# Allegro board Beamforming_PCB_Ver1_0_0.brd
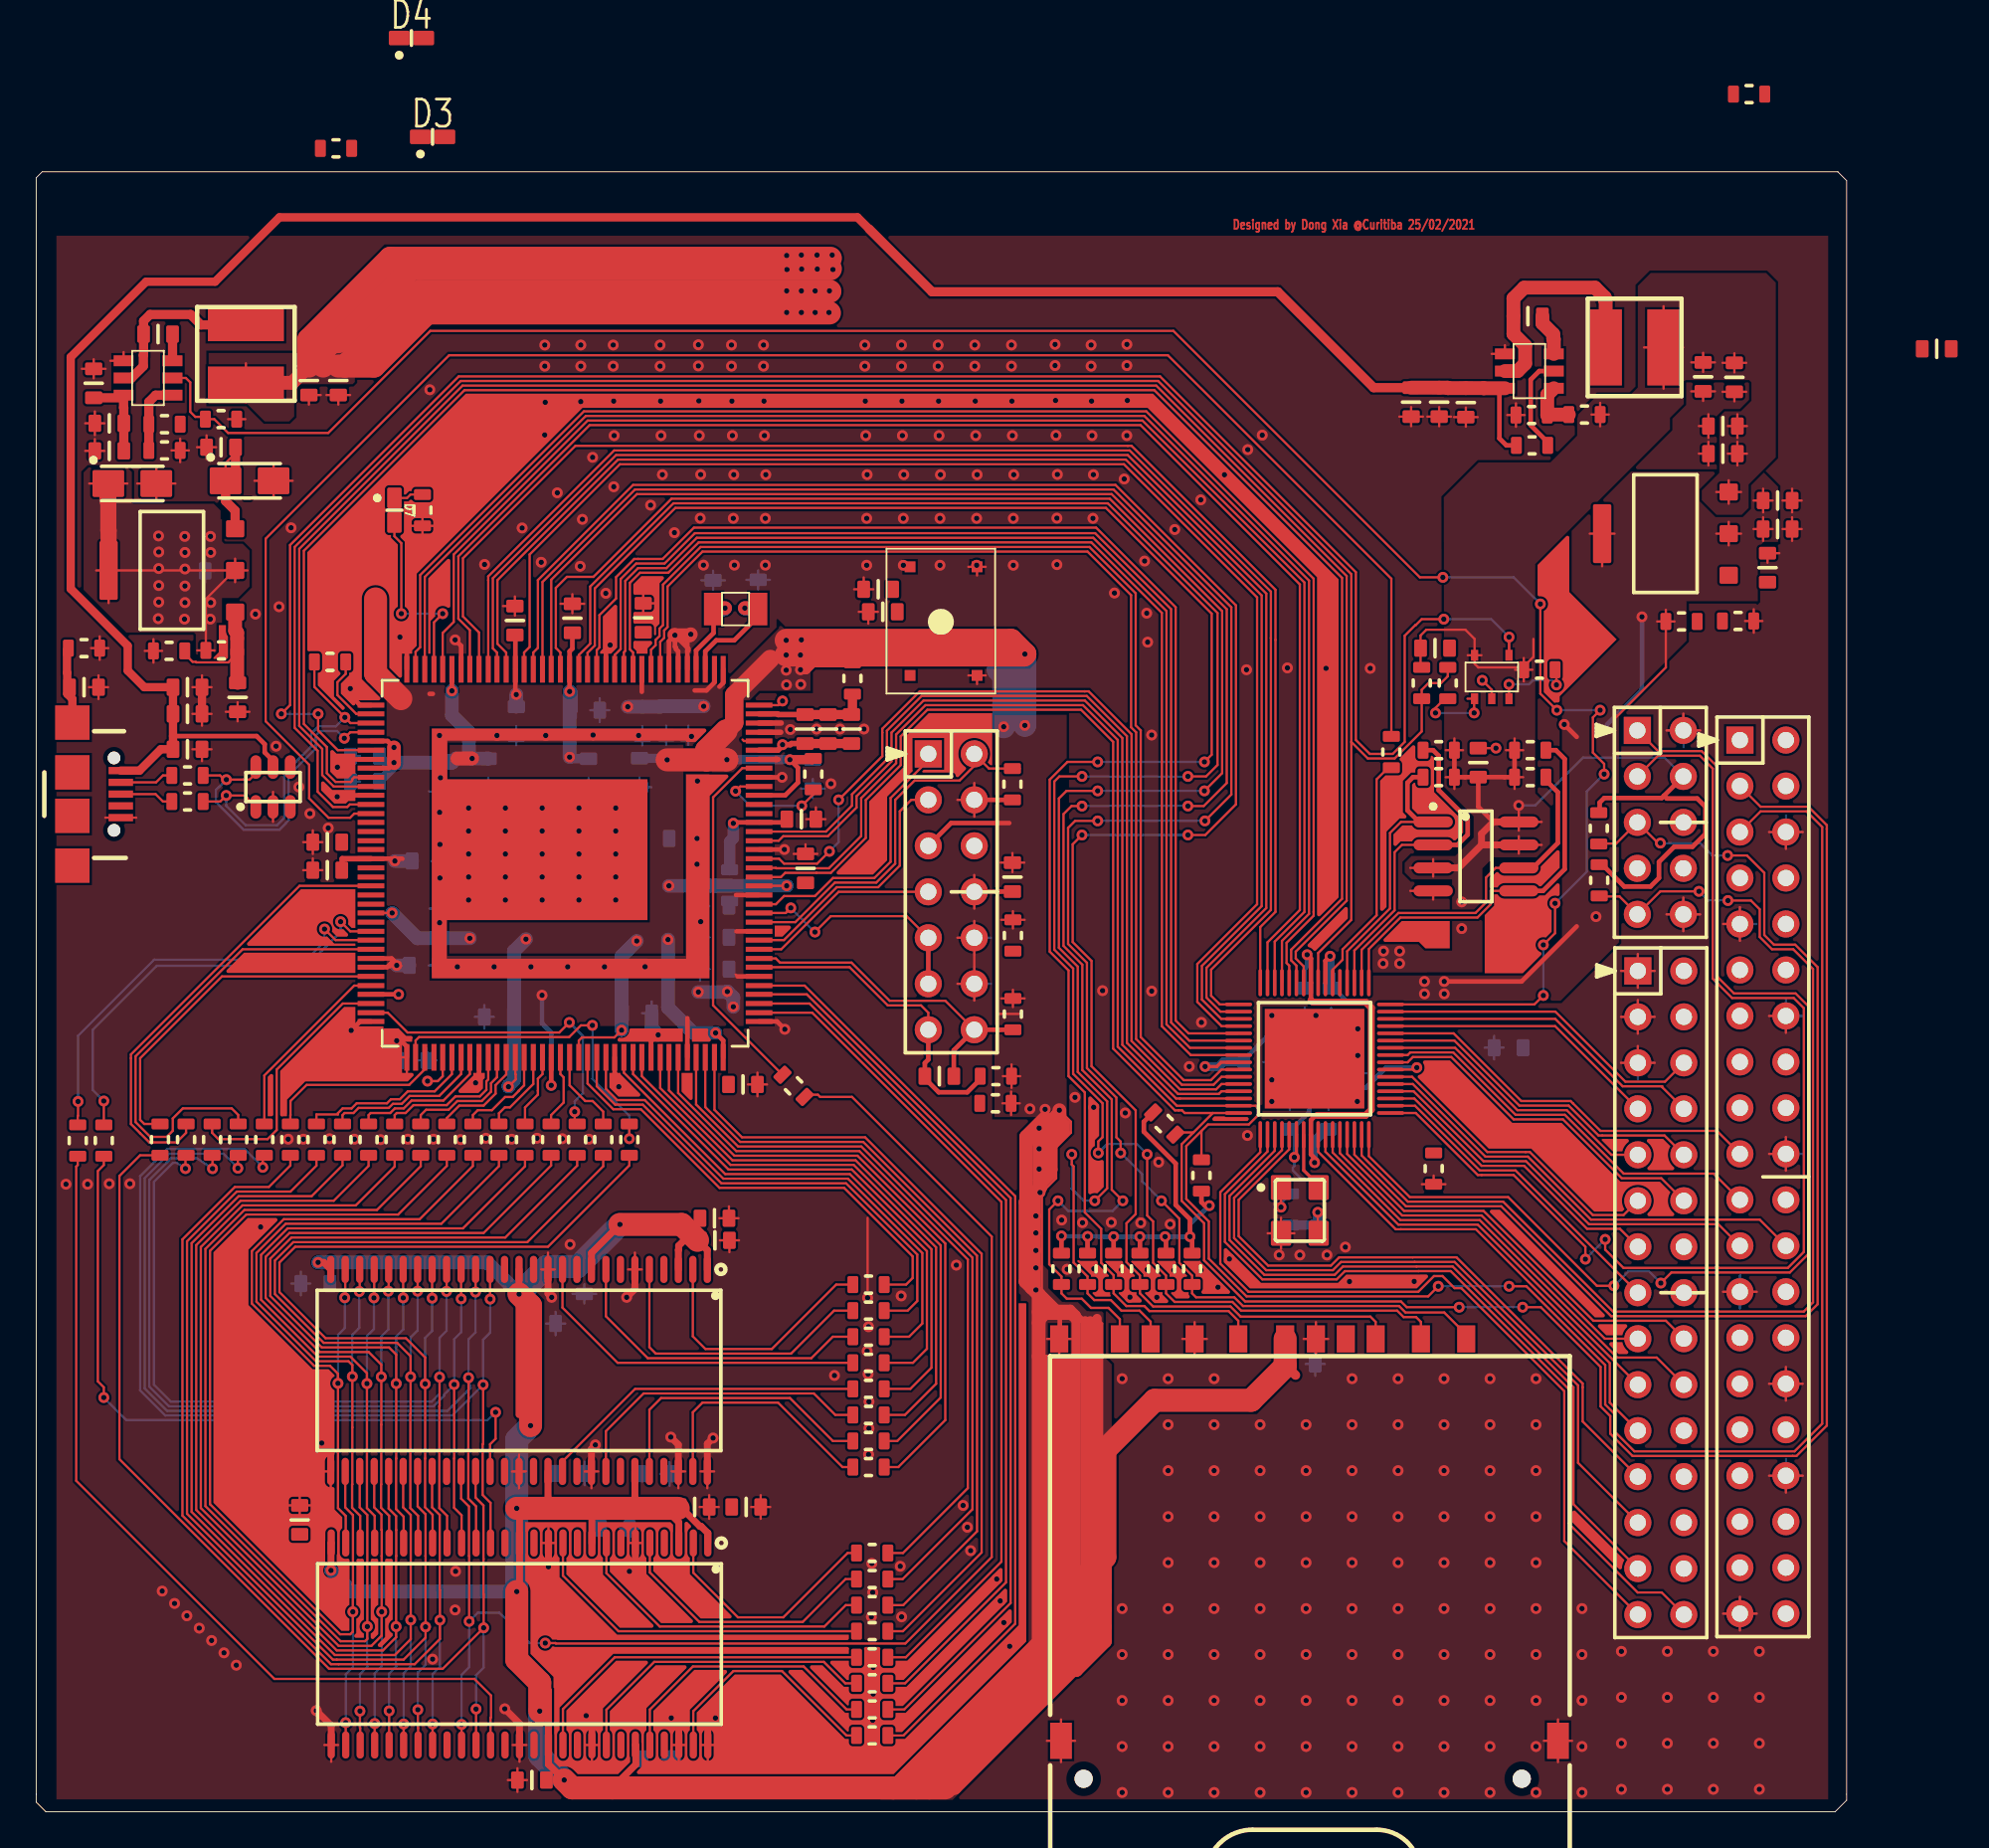
[diagram p0: board, top side]
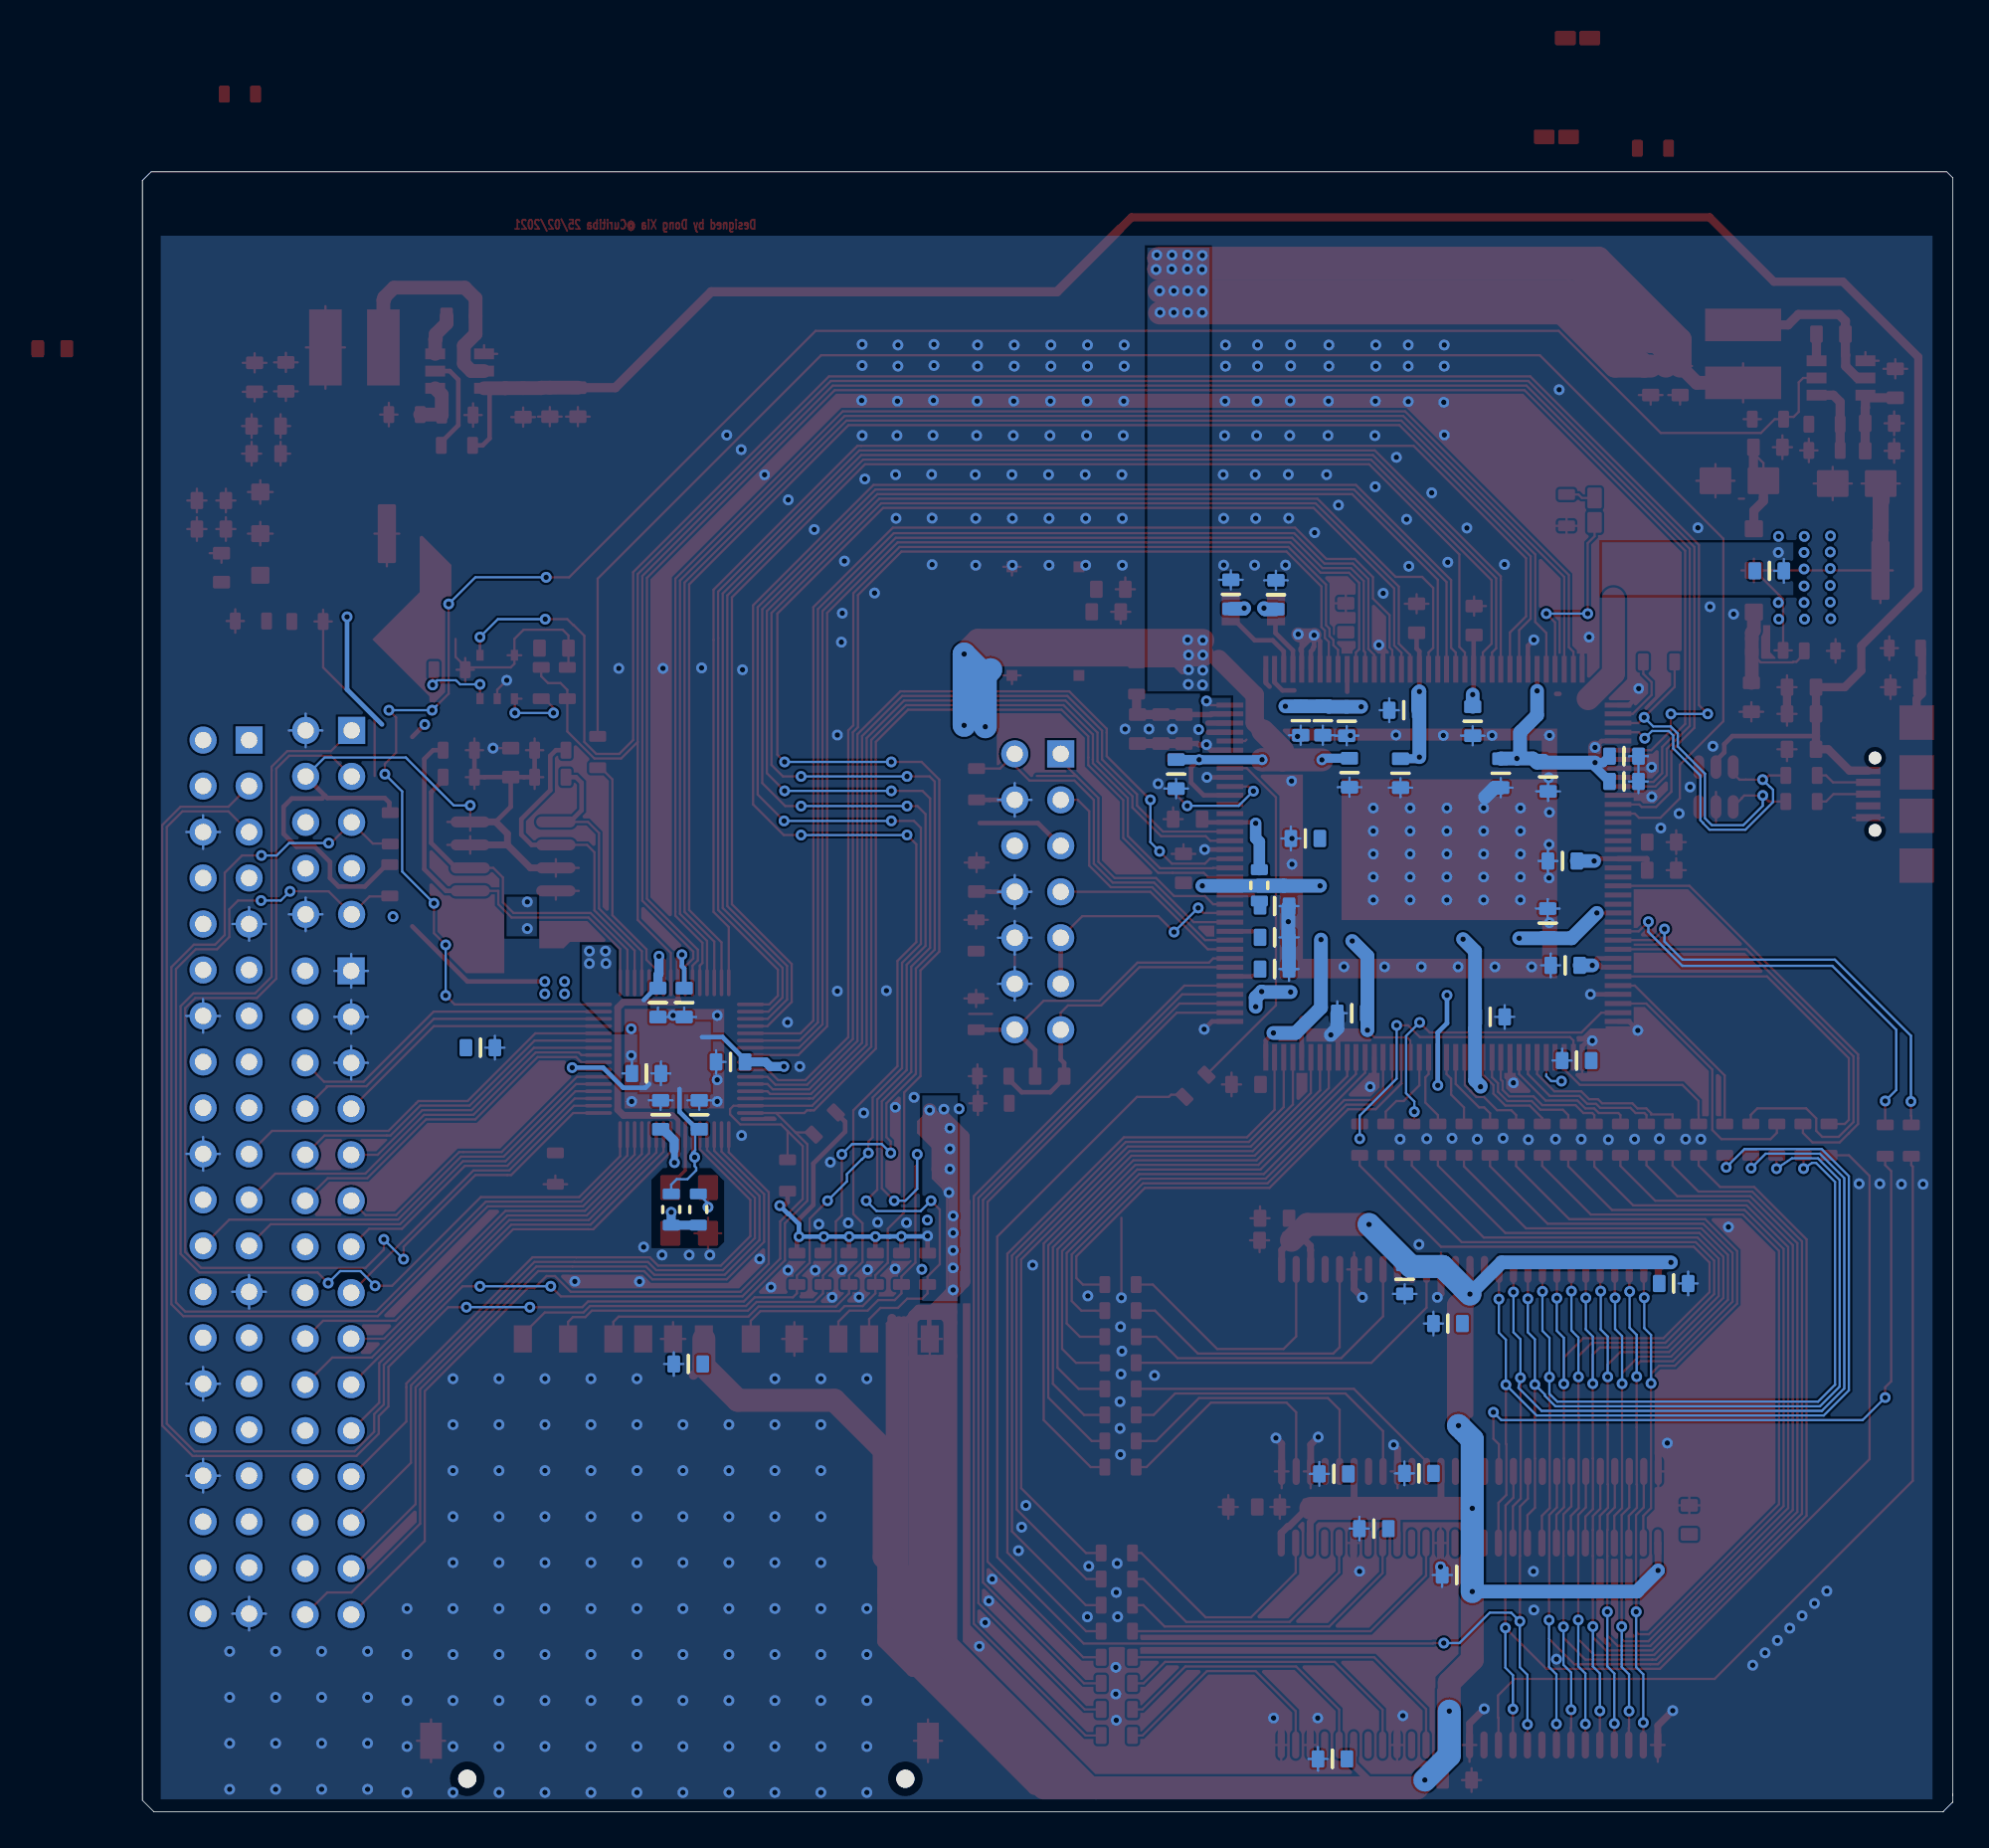
[diagram p1: board, bottom side, seen from below]

Outline 100 x 90.6 mm; copper layers: TOP, BOTTOM. Coordinates in mm from the lower left corner of the outline.
Outline path: 0,90.27 0,0.53 0.53,0 99.36,0 100,0.64 100,90.12 99.52,90.6 0.33,90.6 0,90.27

## Placement (name value [footprint] x y rotation side)
C1  0.1uF  [CAP0603]  30.51 57.38 270 bottom
C2  0.1uF  [CAP0603]  33.2 44.12 0 bottom
C3  0.1uF  [CAP0603]  33.32 57.4 270 bottom
C4  0.1uF  [CAP0603]  42.9 57.33 270 bottom
C5  0.1uF  [CAP0603]  35.76 53.77 0 bottom
C6  0.1uF  [CAP0603]  30.33 60.86 0 bottom
C7  0.1uF  [CAP0603]  18.16 58.32 180 bottom
C8  0.1uF  [CAP0603]  24.97 57.38 270 bottom
C9  0.1uF  [CAP0603]  18.16 56.92 180 bottom
C10  0.1uF  [CAP0603]  42.49 52.12 90 top
C11  0.1uF  [CAP0603]  39.04 40.18 0 top
C12  0.1uF  [CAP0603]  25.55 43.92 180 bottom
C13  0.1uF  [CAP0603]  22.38 49.1 90 bottom
C14  0.1uF  [CAP0603]  22.35 57.18 270 bottom
C15  0.1uF  [CAP0603]  104.98 80.82 0 top
C16  0.1uF  [CAP0603]  29.62 65.94 90 top
C17  0.1uF  [CAP0603]  21.41 46.76 0 bottom
C18  0.1uF  [CAP0603]  21.56 52.53 0 bottom
C19  0.1uF  [CAP0603]  16.08 53.57 180 top
C20  0.1uF  [CAP0603]  37.47 46.56 180 bottom
C21  0.1uF  [CAP0603]  37.47 48.31 180 bottom
C22  0.1uF  [CAP0603]  37.47 50.04 180 bottom
C23  0.1uF  [CAP0603]  26.52 60.25 270 bottom
C24  0.1uF  [CAP0603]  33.48 60.25 270 bottom
C25  0.1uF  [CAP0603]  36.02 60.27 270 bottom
C26  0.1uF  [CAP0603]  34.8 60.27 270 bottom
C27  0.1uF  [CAP0603]  46.51 67.54 180 top
C28  0.1uF  [CAP0603]  46.76 66.29 180 top
C29  0.1uF  [CAP0603]  33.53 65.96 90 top
C30  0.1uF  [CAP0603]  26.44 65.81 90 top
C31  0.1uF  [CAP0603]  16.08 52.02 180 top
C32  0.1uF  [CAP0603]  20.78 41.5 0 bottom
C33  0.1uF  [CAP0603]  42.47 59.82 270 top
C34  0.1uF  [CAP0603]  43.74 59.82 270 top
C35  0.1uF  [CAP0603]  45.03 59.82 270 top
C36  0.1uF  [CAP0603]  53.92 51.64 270 top
C44  18pF  [CAP0603]  37.39 67.23 90 bottom
C45  18pF  [CAP0603]  39.88 67.26 90 bottom
C48  0.1uF  [CAP0603]  6.73 81.64 180 top
C49  22uF  [CAP0805]  15.06 79.07 90 top
C50  47uF  [CAP0805]  3.17 78.92 270 top
C52  4.7uF  [CAP0805]  69.85 24.74 0 bottom
C59  0.1uF  [CAP0603]  10.21 75.39 180 top
C60  0.1uF  [CAP0603]  10.13 68.55 0 bottom
C61  10uF  [CAPMP3216X120]  5.31 73.38 0 top
C62  10uF  [CAPMP3216X120]  11.79 73.53 0 top
C67  10pF  [CAP0603]  2.64 62.13 0 top
C71  47uF  [CAP0805]  8.36 60.66 0 top
C72  2.2uF  [CAP0805]  8.36 62.13 0 top
C73  0.1uF  [CAP0603]  8.36 58.7 0 top
C74  20uF  [CAP0603]  37.49 31.57 0 top
C75  4.7uF  [CAP0805]  37.47 32.79 0 top
C76  0.1uF  [CAP0603]  30.28 29.41 270 bottom
C77  0.1uF  [CAP0603]  29.49 18.69 0 bottom
C78  0.1uF  [CAP0603]  27.89 26.97 0 bottom
C79  0.1uF  [CAP0603]  34.19 18.67 0 bottom
C80  0.1uF  [CAP0603]  15.42 29.18 180 bottom
C83  0.1u  [CAP0603]  42.27 54.84 0 top
C86  20uF  [CAP0603]  36.37 16.84 0 top
C87  4.7uF  [CAP0805]  39.22 16.84 0 top
C88  0.1uF  [CAP0603]  31.98 15.65 0 bottom
C89  0.1uF  [CAP0603]  27.41 13.08 0 bottom
C90  0.1uF  [CAP0603]  14.55 16.13 90 top
C91  0.1uF  [CAP0603]  27.38 1.75 180 top
C92  0.1uF  [CAP0603]  34.26 2.92 0 bottom
C95  10uF  [CAP0805]  4.04 76.71 0 top
C96  10uF  [CAP0805]  4.04 75.18 0 top
C97  0.1uF  [CAP0603]  16.69 79.07 90 top
C98  10uF  [CAP0805]  11.13 61.57 270 top
C99  0.1uF  [CAP0603]  82.4 82.63 180 top
C100  22uF  [CAP0805]  92.08 79.27 90 top
C101  47uF  [CAP0805]  75.95 77.88 90 top
C102  10uF  [CAP0805]  77.5 77.88 90 top
C103  10uF  [CAP0805]  78.97 77.85 90 top
C104  0.1uF  [CAP0603]  93.8 79.25 90 top
C105  0.1uF  [CAP0603]  93.17 76.56 180 top
C106  0.1uF  [CAP0603]  96.19 72.44 0 top
C107  1uF  [CAP0805]  96.19 70.87 0 top
C108  1uF  [CAP0805]  93.17 75.03 180 top
C109  10uF  [CAP0805]  95.63 68.73 90 top
C110  0.22uF  [CAP0603]  77.27 64.29 0 top
C111  0.1uF  [CAP0603]  49.89 40.64 0 top
C112  0.1uF  [CAP0603]  79.65 57.96 90 top
C113  0.1uF  [CAP0603]  72.16 40.79 0 bottom
C114  0.1uF  [CAP0603]  69.24 38.51 90 bottom
C115  0.1uF  [CAP0603]  67.51 41.43 0 bottom
C116  0.1uF  [CAP0603]  71.52 44.7 270 bottom
C118  0.1uF  [CAP0603]  81.33 42.21 180 bottom
C138  0.1uF  [CAP0603]  71.37 38.51 90 bottom
C143  0.1uF  [CAP0603]  70.07 44.7 270 bottom
D3  LED  [LED0603]  21.89 92.53 0 top
D4  LED  [LED0603]  20.73 97.99 0 top
D7  LED  [LED0603]  19.79 71.91 270 top
J1  HEADER 7X2  [HDR254M-2X7]  49.28 58.45 270 top
J9  USB_MICROAB_RECEPTACLE  [MICROQTJ]  -0.15 61.72 270 top
J10  HEADER 20X2  [HDR254M-2X20]  94.11 59.21 270 top
J11  HEADER 15X2  [HDR254M-2X15]  88.47 46.46 270 top
J13  HEADER 5X2  [HDR254M-2X5]  88.44 59.74 270 top
L2  BEAD FERRITE  [RES0603]  45.09 62.61 270 top
L3  BEAD FERRITE  [RES0603]  38.3 51.18 90 bottom
L4  3.3uH  [CKCS5040-3_3UH]  11.3 82.47 270 top
L5  3.3uH  [CKCS5040-3_3UH]  86.36 80.62 0 top
L6  BEAD FERRITE  [RES0603]  70.79 33.27 90 bottom
P2  SDSOCKET  [SD-106M]  56.01 -9.63 0 top
R1  10K  [RES0603]  53.95 48.41 90 top
R2  1K  [RES0603]  53.01 40.64 0 top
R3  1K  [RES0603]  53.95 44.07 90 top
R4  1K  [RES0603]  53.92 56.77 270 top
R6  220Ohm  [RES0603]  94.61 94.89 0 top
R51  33.2K  [RES0603]  7.09 76.66 180 top
R52  10K  [RES0603]  7.09 75.21 180 top
R57  10K  [RES0603]  10.21 76.94 180 top
R58  10K  [RES0603]  83.03 63.09 180 top
R59  10K  [RES0603]  77.97 62.36 270 top
R60  10K  [RES0603]  76.53 62.36 270 top
R61  1M  [RES0603]  2.64 64.29 0 top
R133  10K  [RES0603]  59.51 30 90 top
R134  10K  [RES0603]  60.97 30 90 top
R135  20Ohm  [RES0603]  8.36 57.25 0 top
R136  20Ohm  [RES0603]  8.36 55.81 0 top
R137  4.7K  [RES0603]  64.36 35.15 90 top
R138  4.7K  [RES0603]  62.31 38.02 315 top
R139  0Ohm  [RES0603]  74.85 58.55 90 top
R142  30Ohm  [RES0603]  31.32 37.13 270 top
R143  30Ohm  [RES0603]  28.44 37.13 270 top
R144  30Ohm  [RES0603]  27 37.13 270 top
R145  30Ohm  [RES0603]  25.56 37.13 270 top
R146  30Ohm  [RES0603]  24.12 37.13 270 top
R147  30Ohm  [RES0603]  22.68 37.13 270 top
R148  30Ohm  [RES0603]  21.24 37.13 270 top
R149  30Ohm  [RES0603]  19.8 37.13 270 top
R150  30Ohm  [RES0603]  18.36 37.13 270 top
R151  30Ohm  [RES0603]  16.92 37.13 270 top
R152  30Ohm  [RES0603]  15.48 37.13 270 top
R154  30Ohm  [RES0603]  14.04 37.13 270 top
R155  30Ohm  [RES0603]  32.76 37.13 270 top
R156  30Ohm  [RES0603]  29.88 37.13 270 top
R157  30Ohm  [RES0603]  9.72 37.13 270 top
R158  30Ohm  [RES0603]  12.6 37.13 270 top
R159  30Ohm  [RES0603]  6.84 37.13 270 top
R160  30Ohm  [RES0603]  11.16 37.13 270 top
R161  30Ohm  [RES0603]  41.83 40.11 315 top
R162  30Ohm  [RES0603]  8.28 37.13 90 top
R163  30Ohm  [RES0603]  3.73 37.08 90 top
R164  30Ohm  [RES0603]  2.29 37.08 90 top
R165  30Ohm  [RES0603]  45.97 29.13 0 top
R166  30Ohm  [RES0603]  45.97 27.69 0 top
R167  30Ohm  [RES0603]  45.97 26.25 0 top
R168  30Ohm  [RES0603]  45.97 24.81 0 top
R169  30Ohm  [RES0603]  45.97 23.37 0 top
R170  30Ohm  [RES0603]  45.97 21.93 0 top
R171  30Ohm  [RES0603]  45.97 20.49 0 top
R172  30Ohm  [RES0603]  45.97 19.04 0 top
R173  30Ohm  [RES0603]  46.18 14.3 0 top
R174  30Ohm  [RES0603]  46.18 12.86 0 top
R175  30Ohm  [RES0603]  46.18 11.42 0 top
R176  30Ohm  [RES0603]  46.18 9.98 0 top
R177  30Ohm  [RES0603]  46.18 8.54 0 top
R178  30Ohm  [RES0603]  46.18 7.1 0 top
R179  30Ohm  [RES0603]  46.18 5.66 0 top
R180  30Ohm  [RES0603]  46.18 4.22 0 top
R181  10K  [RES0603]  7.34 64.14 0 top
R182  2.8K  [RES0603]  10.24 64.16 180 top
R183  10K  [RES0603]  82.63 75.49 180 top
R184  10K  [RES0603]  82.6 77.17 0 top
R185  33.2K  [RES0603]  85.52 77.19 180 top
R186  10K  [RES0603]  94.01 65.79 180 top
R187  2.8K  [RES0603]  90.88 65.76 180 top
R188  220Ohm  [RES0603]  16.56 91.9 0 top
R189  1.5K  [RES0603]  16.23 63.53 0 top
R190  10K  [RES0603]  56.63 30 90 top
R191  10K  [RES0603]  58.07 30 90 top
R192  10K  [RES0603]  63.85 30 90 top
R193  10K  [RES0603]  62.41 30 90 top
R194  1K  [RES0603]  77.19 35.53 270 top
R195  1K  [RES0603]  86.31 54.33 90 top
R196  1K  [RES0603]  86.33 51.46 90 top
R197  4.7K  [RES0603]  77.47 57.16 0 top
R198  4.7K  [RES0603]  77.47 58.65 0 top
R199  4.7K  [RES0603]  82.52 57.16 0 top
R200  4.7K  [RES0603]  82.52 58.65 0 top
R201  220Ohm  [RES0603]  21.34 71.91 90 top
R202  4.7K  [RES0603]  42.93 57.33 270 top
R203  4.7K  [RES0603]  69.29 33.27 270 bottom
R204  2.2K  [RES0603]  52.98 39.14 0 top
SW3  SW_TC_SPST  [SPST_BUTTON]  51.97 63.78 90 top
U1  5M40ZE64C5N  [QFP40P900X900X120-65N]  70.61 41.61 90 top
U2  TMS320VC5509APGE  [QFP50P2200X2200X160-144N]  29.21 52.4 0 top
U15  -  [TPS562201]  4.83 80.16 0 top
U18  AMS1117  [SOT223]  7.49 68.58 90 top
U20  STWD100NYWY3F  [STWD100]  79.45 61.49 90 top
U21  -  [SRV05-4-N]  13.08 56.62 0 top
U22  MT48LC8M8A2  [TSOP80P1175X120-54]  26.67 24.38 180 top
U23  MT48LC8M8A2  [TSOP80P1175X120-54]  26.7 9.27 180 top
U24  -  [TPS562201]  81.13 80.54 0 top
U25  AMS1117  [SOT223]  89.99 70.61 90 top
U26  AT25256B  [SOIC127P600X175-8]  79.53 52.78 270 top
Y2  32768Hz  [32768KHZCRYSTAL]  38.63 66.45 0 top
Y3  Oscillator 24MHz  [OSCCC250X320X100]  69.8 33.22 0 top

## Library data of the parts
C1-C35 = CAP NP: User Part Number: pn; Tolerance: RichardLC; room: DSP_CAPS
C36 C111 = CAP NP: User Part Number: pn; Tolerance: RichardLC; room: DSP_JTAG
C44 C45 = CAP NP: User Part Number: pn; Tolerance: RichardLC; room: DSP_CRY
C48-C50 C59 C60 C95-C98 = CAP NP: User Part Number: pn; Tolerance: RichardLC; room: PWR_DSP
C52 = CAP NP: User Part Number: pn; Tolerance: RichardLC; room: DSP_SD
C61 C62 = CAP POL: User Part Number: pn; Tolerance: RichardLC; room: PWR_DSP
C67 = CAP NP: User Part Number: pn; Tolerance: RichardLC; room: DSP_USB
C71-C73 = CAPACITOR NON-POL: User Part Number: pn; Tolerance: RichardLC; room: DSP_USB
C74-C80 C86-C92 = CAPACITOR NON-POL: User Part Number: pn; Tolerance: RichardLC; room: SDRAM
C83 = CAP NP: User Part Number: pn; Tolerance: RichardLC; room: DSP
C99-C106 C109 = CAP NP: User Part Number: pn; Tolerance: RichardLC; room: PWR_CPLD
C107 C108 = CAP POL: User Part Number: pn; Tolerance: RichardLC; room: PWR_CPLD
C110 = CAP NP: User Part Number: pn; Tolerance: RichardLC; room: DSP_WDOG
C112-C116 C118 C138 C143 = CAP NP: User Part Number: pn; Tolerance: RichardLC; room: CPLD_CAPS
D3 D4 = LED: User Part Number: pn; Tolerance: RichardLC; room: PWR
D7 = LED: User Part Number: pn; Tolerance: RichardLC; room: DSP_LED
J1 = HEADER 7X2: User Part Number: pn; Tolerance: RichardLC; room: DSP_JTAG
J9 = USB_MINI_AB_RECEPTACLE: room: DSP_USB
J10 = HEADER 20X2: User Part Number: pn; Tolerance: RichardLC; room: CONNECTOR
J11 = HEADER 15X2: User Part Number: pn; Tolerance: RichardLC; room: CONNECTOR
J13 = HEADER 5X2: User Part Number: pn; Tolerance: RichardLC; room: CPLD_JTAG
L2 L3 = BEAD FERRITE: User Part Number: pn; Tolerance: RichardLC; room: PWR_DSP
L4 = INDUCTOR: room: PWR_DSP
L5 = INDUCTOR: room: PWR_CPLD
L6 = BEAD FERRITE: User Part Number: pn; Tolerance: RichardLC; room: CPLD_CRY
P2 = SDSOCKET: room: DSP_SD
R1-R4 = RESISTOR: User Part Number: pn; Tolerance: RichardLC; room: DSP_JTAG
R6 R188 = RESISTOR: User Part Number: pn; Tolerance: RichardLC; room: PWR
R51 R52 R57 R181 R182 R202 = RESISTOR: User Part Number: pn; Tolerance: RichardLC; room: PWR_DSP
R58-R60 = RESISTOR: User Part Number: pn; Tolerance: RichardLC; room: DSP_WDOG
R61 R135 R136 = RESISTOR: User Part Number: pn; Tolerance: RichardLC; room: DSP_USB
R133 R134 R190-R193 = RESISTOR: User Part Number: pn; Tolerance: RichardLC; room: DSP_SD
R137-R139 R189 = RESISTOR: User Part Number: pn; Tolerance: RichardLC; room: DSP
R142-R152 R154-R180 R204 = RESISTOR: User Part Number: pn; Tolerance: RichardLC; room: SDRAM
R183-R187 = RESISTOR: User Part Number: pn; Tolerance: RichardLC; room: PWR_CPLD
R194-R196 = RESISTOR: User Part Number: pn; Tolerance: RichardLC; room: CPLD_JTAG
R197-R200 = RESISTOR: User Part Number: pn; Tolerance: RichardLC; room: CPLD_EEPROM
R201 = RESISTOR: User Part Number: pn; Tolerance: RichardLC; room: DSP_LED
R203 = RESISTOR: User Part Number: pn; Tolerance: RichardLC; room: CPLD_CRY
SW3 = SW_TC_SPST: room: PWR
U1 = 5M40ZE64C5N_2
U2 = TMS340VC5509APGE: room: DSP
U15 = TPS562201: room: PWR_DSP
U18 = AMS1117: User Part Number: pn; Tolerance: RichardLC; room: PWR_DSP
U20 = STWD100NYWY3F: room: DSP_WDOG
U21 = SESOT12CLC: User Part Number: pn; Tolerance: RichardLC; room: DSP_USB
U22 U23 = MT48LC8M8A2: User Part Number: pn; Tolerance: RichardLC; room: SDRAM
U24 = TPS562201: room: PWR_CPLD
U25 = AMS1117: User Part Number: pn; Tolerance: RichardLC; room: PWR_CPLD
U26 = AT25256B: User Part Number: pn; Tolerance: RichardLC; room: CPLD_EEPROM
Y2 = CRYSTAL_1: room: DSP_CRY
Y3 = Crystal_0: User Part Number: pn; Tolerance: RichardLC; room: CPLD_CRY

## Footprints (pads in the part's own frame, mm; a bottom-side part is the same pattern mirrored in y, then rotated)
32768KHZCRYSTAL
  rect 1x1.8 smd: 1(-1.25,0) 2(1.25,0)
CAP0603
  custom 0.7x0.95 smd: 1(-0.8,0) 2(0.8,0)
CAP0805
  custom 0.7x0.95 smd: 1(-0.8,0) 2(0.8,0)
CAPMP3216X120
  custom 1.75x1.484 smd: 1(-1.325,0) 2(1.325,0)
CKCS5040-3_3UH
  rect 1.8x4.2 smd: 1(0.33,0.279) 2(3.53,0.279)
HDR254M-2X5
  rect 1.5x1.5 hole 0.9: 1(0,0)
  round 1.5 hole 0.9: 2(0,2.54) 3(2.54,0) 4(2.54,2.54) 5(5.08,0) 6(5.08,2.54) 7(7.62,0) 8(7.62,2.54) 9(10.16,0) 10(10.16,2.54)
HDR254M-2X7
  rect 1.5x1.5 hole 0.9: 1(0,0)
  round 1.5 hole 0.9: 2(0,2.54) 3(2.54,0) 4(2.54,2.54) 5(5.08,0) 6(5.08,2.54) 7(7.62,0) 8(7.62,2.54) 9(10.16,0) 10(10.16,2.54) 11(12.7,0) 12(12.7,2.54) 13(15.24,0) 14(15.24,2.54)
HDR254M-2X15
  rect 1.5x1.5 hole 0.9: 1(0,0)
  round 1.5 hole 0.9: 2(0,2.54) 3(2.54,0) 4(2.54,2.54) 5(5.08,0) 6(5.08,2.54) 7(7.62,0) 8(7.62,2.54) 9(10.16,0) 10(10.16,2.54) 11(12.7,0) 12(12.7,2.54) 13(15.24,0) 14(15.24,2.54) 15(17.78,0) 16(17.78,2.54) 17(20.32,0) 18(20.32,2.54) 19(22.86,0) 20(22.86,2.54) 21(25.4,0) 22(25.4,2.54) 23(27.94,0) 24(27.94,2.54) 25(30.48,0) 26(30.48,2.54) 27(33.02,0) 28(33.02,2.54) 29(35.56,0) 30(35.56,2.54)
HDR254M-2X20
  rect 1.5x1.5 hole 0.9: 1(0,0)
  round 1.5 hole 0.9: 2(0,2.54) 3(2.54,0) 4(2.54,2.54) 5(5.08,0) 6(5.08,2.54) 7(7.62,0) 8(7.62,2.54) 9(10.16,0) 10(10.16,2.54) 11(12.7,0) 12(12.7,2.54) 13(15.24,0) 14(15.24,2.54) 15(17.78,0) 16(17.78,2.54) 17(20.32,0) 18(20.32,2.54) 19(22.86,0) 20(22.86,2.54) 21(25.4,0) 22(25.4,2.54) 23(27.94,0) 24(27.94,2.54) 25(30.48,0) 26(30.48,2.54) 27(33.02,0) 28(33.02,2.54) 29(35.56,0) 30(35.56,2.54) 31(38.1,0) 32(38.1,2.54) 33(40.64,0) 34(40.64,2.54) 35(43.18,0) 36(43.18,2.54) 37(45.72,0) 38(45.72,2.54) 39(48.26,0) 40(48.26,2.54)
LED0603
  custom 1.15x0.8 smd: 1(-0.675,0) 2(0.675,0)
MICROQTJ
  round 0.7 hole 0.8 unplated: (3.5,4.45) (7.5,4.45)
  rect 0.4x1.35 smd: 1(4.2,4.825) 2(4.85,4.825) 3(5.5,4.825) 4(6.15,4.825) 5(6.8,4.825)
  rect 1.9x1.9 smd: S1(6.7,2.15) S2(1.55,2.15) S3(9.45,2.15) S4(4.3,2.15)
OSCCC250X320X100
  custom 1.12x1.37 smd: 1(-1.04,1.265) 2(-1.04,-1.265) 3(1.04,1.265) 4(1.04,-1.265)
QFP40P900X900X120-65N
  custom 1.5x0.2 smd: 1(-4.2,3) 2(-4.2,2.6) 3(-4.2,2.2) 4(-4.2,1.8) 5(-4.2,1.4) 6(-4.2,1) 7(-4.2,0.6) 8(-4.2,0.2) 9(-4.2,-0.2) 10(-4.2,-0.6) 11(-4.2,-1) 12(-4.2,-1.4) 13(-4.2,-1.8) 14(-4.2,-2.2) 15(-4.2,-2.6) 16(-4.2,-3) 33(4.2,-3) 34(4.2,-2.6) 35(4.2,-2.2) 36(4.2,-1.8) 37(4.2,-1.4) 38(4.2,-1) 39(4.2,-0.6) 40(4.2,-0.2) 41(4.2,0.2) 42(4.2,0.6) 43(4.2,1) 44(4.2,1.4) 45(4.2,1.8) 46(4.2,2.2) 47(4.2,2.6) 48(4.2,3)
  custom 0.2x1.5 smd: 17(-3,-4.2) 18(-2.6,-4.2) 19(-2.2,-4.2) 20(-1.8,-4.2) 21(-1.4,-4.2) 22(-1,-4.2) 23(-0.6,-4.2) 24(-0.2,-4.2) 25(0.2,-4.2) 26(0.6,-4.2) 27(1,-4.2) 28(1.4,-4.2) 29(1.8,-4.2) 30(2.2,-4.2) 31(2.6,-4.2) 32(3,-4.2) 49(3,4.2) 50(2.6,4.2) 51(2.2,4.2) 52(1.8,4.2) 53(1.4,4.2) 54(1,4.2) 55(0.6,4.2) 56(0.2,4.2) 57(-0.2,4.2) 58(-0.6,4.2) 59(-1,4.2) 60(-1.4,4.2) 61(-1.8,4.2) 62(-2.2,4.2) 63(-2.6,4.2) 64(-3,4.2)
  rect 5.5x5.5 smd: 65(0,0)
QFP50P2200X2200X160-144N
  rect 1.473x0.279 smd: 1(-10.719,8.738) 2(-10.719,8.255) 3(-10.719,7.747) 4(-10.719,7.239) 5(-10.719,6.756) 6(-10.719,6.248) 7(-10.719,5.74) 8(-10.719,5.258) 9(-10.719,4.75) 10(-10.719,4.242) 11(-10.719,3.759) 12(-10.719,3.251) 13(-10.719,2.743) 14(-10.719,2.261) 15(-10.719,1.753) 16(-10.719,1.245) 17(-10.719,0.762) 18(-10.719,0.254) 19(-10.719,-0.254) 20(-10.719,-0.762) 21(-10.719,-1.245) 22(-10.719,-1.753) 23(-10.719,-2.261) 24(-10.719,-2.743) 25(-10.719,-3.251) 26(-10.719,-3.759) 27(-10.719,-4.242) 28(-10.719,-4.75) 29(-10.719,-5.258) 30(-10.719,-5.74) 31(-10.719,-6.248) 32(-10.719,-6.756) 33(-10.719,-7.239) 34(-10.719,-7.747) 35(-10.719,-8.255) 36(-10.719,-8.738) 73(10.719,-8.738) 74(10.719,-8.255) 75(10.719,-7.747) 76(10.719,-7.239) 77(10.719,-6.756) 78(10.719,-6.248) 79(10.719,-5.74) 80(10.719,-5.258) 81(10.719,-4.75) 82(10.719,-4.242) 83(10.719,-3.759) 84(10.719,-3.251) 85(10.719,-2.743) 86(10.719,-2.261) 87(10.719,-1.753) 88(10.719,-1.245) 89(10.719,-0.762) 90(10.719,-0.254) 91(10.719,0.254) 92(10.719,0.762) 93(10.719,1.245) 94(10.719,1.753) 95(10.719,2.261) 96(10.719,2.743) 97(10.719,3.251) 98(10.719,3.759) 99(10.719,4.242) 100(10.719,4.75) 101(10.719,5.258) 102(10.719,5.74) 103(10.719,6.248) 104(10.719,6.756) 105(10.719,7.239) 106(10.719,7.747) 107(10.719,8.255) 108(10.719,8.738)
  rect 0.279x1.473 smd: 37(-8.738,-10.719) 38(-8.255,-10.719) 39(-7.747,-10.719) 40(-7.239,-10.719) 41(-6.756,-10.719) 42(-6.248,-10.719) 43(-5.74,-10.719) 44(-5.258,-10.719) 45(-4.75,-10.719) 46(-4.242,-10.719) 47(-3.759,-10.719) 48(-3.251,-10.719) 49(-2.743,-10.719) 50(-2.261,-10.719) 51(-1.753,-10.719) 52(-1.245,-10.719) 53(-0.762,-10.719) 54(-0.254,-10.719) 55(0.254,-10.719) 56(0.762,-10.719) 57(1.245,-10.719) 58(1.753,-10.719) 59(2.261,-10.719) 60(2.743,-10.719) 61(3.251,-10.719) 62(3.759,-10.719) 63(4.242,-10.719) 64(4.75,-10.719) 65(5.258,-10.719) 66(5.74,-10.719) 67(6.248,-10.719) 68(6.756,-10.719) 69(7.239,-10.719) 70(7.747,-10.719) 71(8.255,-10.719) 72(8.738,-10.719) 109(8.738,10.719) 110(8.255,10.719) 111(7.747,10.719) 112(7.239,10.719) 113(6.756,10.719) 114(6.248,10.719) 115(5.74,10.719) 116(5.258,10.719) 117(4.75,10.719) 118(4.242,10.719) 119(3.759,10.719) 120(3.251,10.719) 121(2.743,10.719) 122(2.261,10.719) 123(1.753,10.719) 124(1.245,10.719) 125(0.762,10.719) 126(0.254,10.719) 127(-0.254,10.719) 128(-0.762,10.719) 129(-1.245,10.719) 130(-1.753,10.719) 131(-2.261,10.719) 132(-2.743,10.719) 133(-3.251,10.719) 134(-3.759,10.719) 135(-4.242,10.719) 136(-4.75,10.719) 137(-5.258,10.719) 138(-5.74,10.719) 139(-6.248,10.719) 140(-6.756,10.719) 141(-7.239,10.719) 142(-7.747,10.719) 143(-8.255,10.719) 144(-8.738,10.719)
RES0603
  custom 0.6x0.94 smd: 1(-0.865,0) 2(0.865,0)
SD-106M
  round 1 hole 1.5 unplated: (1.85,11.45) (26.05,11.45)
  rect 1x1.5 smd: 1(20.48,35.75) 2(17.98,35.75) 3(14.68,35.75) 4(12.98,35.75) 5(10.39,35.75) 6(7.98,35.75) 7(5.55,35.75) 8(3.85,35.75) 9(22.98,35.75) 10(16.33,35.75) 11(0.5,35.75)
  rect 1.2x2 smd: 12(0.6,13.55) 13(28.05,13.55)
SOIC127P600X175-8
  oval 0.61x2.17 smd: 1(-1.905,-2.365) 2(-0.635,-2.365) 3(0.635,-2.365) 4(1.905,-2.365) 5(1.905,2.365) 6(0.635,2.365) 7(-0.635,2.365) 8(-1.905,2.365)
SOT223
  custom 0.94x1.01 smd: 1(-2.3,-3.495) 2(0,-3.495) 3(2.3,-3.495)
  custom 3.25x1.01 smd: 4(0,3.495)
SPST_BUTTON
  rect 0.6x0.6 smd: 1(-1,0) 2(5,0) 3(-1,3.7) 4(5,3.7)
SRV05-4-N
  oval 0.6x1.3 smd: 1(-0.95,-1.1) 2(0,-1.1) 3(0.95,-1.1) 4(0.95,1.1) 5(0,1.1) 6(-0.95,1.1)
STWD100
  rect 0.6x0.4 smd: 1(0,0) 2(0,-0.95) 3(0,-1.9) 4(2.4,-1.9) 5(2.4,0)
TPS562201
  rect 1.1x0.6 smd: 1(0,0) 2(0,-0.95) 3(0,-1.9) 4(2.7,-1.9) 5(2.7,-0.95) 6(2.7,0)
TSOP80P1175X120-54
  oval 0.4x1.5 smd: 1(-10.4,-5.58) 2(-9.6,-5.58) 3(-8.8,-5.58) 4(-8,-5.58) 5(-7.2,-5.58) 6(-6.4,-5.58) 7(-5.6,-5.58) 8(-4.8,-5.58) 9(-4,-5.58) 10(-3.2,-5.58) 11(-2.4,-5.58) 12(-1.6,-5.58) 13(-0.8,-5.58) 14(0,-5.58) 15(0.8,-5.58) 16(1.6,-5.58) 17(2.4,-5.58) 18(3.2,-5.58) 19(4,-5.58) 20(4.8,-5.58) 21(5.6,-5.58) 22(6.4,-5.58) 23(7.2,-5.58) 24(8,-5.58) 25(8.8,-5.58) 26(9.6,-5.58) 27(10.4,-5.58) 28(10.4,5.58) 29(9.6,5.58) 30(8.8,5.58) 31(8,5.58) 32(7.2,5.58) 33(6.4,5.58) 34(5.6,5.58) 35(4.8,5.58) 36(4,5.58) 37(3.2,5.58) 38(2.4,5.58) 39(1.6,5.58) 40(0.8,5.58) 41(0,5.58) 42(-0.8,5.58) 43(-1.6,5.58) 44(-2.4,5.58) 45(-3.2,5.58) 46(-4,5.58) 47(-4.8,5.58) 48(-5.6,5.58) 49(-6.4,5.58) 50(-7.2,5.58) 51(-8,5.58) 52(-8.8,5.58) 53(-9.6,5.58) 54(-10.4,5.58)

## Nets
1V6D: C17.1 C18.1 C19.1 C20.1 C21.1 C22.1 C23.1 C24.1 C25.1 C26.1 C27.1 C28.1 C29.1 C30.1 C31.1 C32.1 C60.1 C61.1 L3.1 R182.2 U2.18(CVDD1) U2.29(CVDD2) U2.30(CVDD3) U2.41(CVDD4) U2.53(CVDD5) U2.68(CVDD6) U2.78(CVDD7) U2.83(CVDD8) U2.87(CVDD9) U2.109(RDVDD) U2.110(RCVDD) U2.118(CVDD10) U2.132(CVDD11) U18.2(VO) U18.4(VO_TAB)
1V8D: C106.1 C107.1 C138.1 C143.1 R187.2 U1.8(VCCINT@1) U1.41(VCCINT@2) U25.2(VO) U25.4(VO_TAB)
3V3CPLD: C100.2 C104.2 C105.1 C108.1 C110.1 C112.1 C113.1 C114.1 C115.1 C116.1 C118.1 D4.2(ANODE) J11.4 J13.4 L5.2 L6.2 R58.2 R60.1 R185.1 R195.2 R196.2 R197.2 R198.2 R199.1 R200.1 U1.6(VCCIO1@1) U1.23(VCCIO1@2) U1.39(VCCIO2@1) U1.57(VCCIO2@2) U20.5(VCC) U25.3(VI) U26.3(/WP) U26.7(/HOLD) U26.8(VCC)
3V3DSP: C1.1 C2.1 C3.1 C4.1 C5.1 C6.1 C7.1 C8.1 C9.1 C10.1 C11.1 C12.1 C13.1 C14.1 C15.1 C16.1 C36.1 C49.2 C52.1 C59.1 C62.1 C74.1 C75.1 C76.1 C77.1 C78.1 C79.1 C80.1 C86.1 C87.1 C88.1 C89.1 C90.1 C91.1 C92.1 C97.2 D3.2(ANODE) J1.5 L2.1 L4.2 P2.4(VDD) P2.11(WP) R1.2 R2.2 R3.2 R51.1 R133.2 R134.2 R137.1 R138.1 R190.2 R191.2 R192.2 R193.2 R202.1 R204.2 U2.5(USBVDD) U2.8(DVCC1) U2.24(DVCC2) U2.49(DVCC3) U2.56(DVCC4) U2.72(DVCC5) U2.88(DVCC6) U2.98(DVCC7) U2.126(DVCC8) U2.139(DVCC9) U18.3(VI) U22.1(VDD1) U22.3(VDDQ1) U22.9(VDDQ2) U22.14(VDD2) U22.27(VDD3) U22.43(VDDQ3) U22.49(VDDQ4) U23.1(VDD1) U23.3(VDDQ1) U23.9(VDDQ2) U23.14(VDD2) U23.27(VDD3) U23.43(VDDQ3) U23.49(VDDQ4)
5VIN: C50.2 C71.1 C72.1 C73.1 C95.2 C96.2 C101.2 C102.2 C103.2 J9.1(P1) J11.2 R183.2 U15.3(VIN) U21.5(VCC) U24.3(VIN)
5VRASP: J10.2 J10.4
AGND: C33.2 C34.2 C35.2 U2.103(ADVSS) U2.108(AVSS)
DGND: C1.2 C2.2 C3.2 C4.2 C5.2 C6.2 C7.2 C8.2 C9.2 C10.2 C11.2 C12.2 C13.2 C14.2 C15.2 C16.2 C17.2 C18.2 C19.2 C20.2 C21.2 C22.2 C23.2 C24.2 C25.2 C26.2 C27.2 C28.2 C29.2 C30.2 C31.2 C32.2 C36.2 C44.2 C45.2 C49.1 C50.1 C52.2 C59.2 C60.2 C61.2 C62.2 C67.2 C71.2 C72.2 C73.2 C74.2 C75.2 C76.2 C77.2 C78.2 C79.2 C80.2 C83.2 C86.2 C87.2 C88.2 C89.2 C90.2 C91.2 C92.2 C95.1 C96.1 C97.1 C98.2 C100.1 C101.1 C102.1 C103.1 C104.1 C105.2 C106.2 C107.2 C108.2 C109.2 C110.2 C112.2 C113.2 C114.2 C115.2 C116.2 C118.2 C138.2 C143.2 J1.4 J1.8 J1.10 J1.12 J9.5(P5) J10.6 J10.9 J10.14 J10.20 J10.25 J10.30 J10.34 J10.39 J11.1 J11.3 J11.5 J13.2 J13.10 P2.3(VSS1) P2.6(VSS2) P2.12(GND0) P2.13(GND1) R4.2 R6.1 R52.1 R57.1 R61.2 R181.1 R184.1 R186.1 R188.1 R194.2 R201.1 SW3.1 SW3.2 U1.65(GND) U2.1(VSS1) U2.7(VSS2) U2.11(VSS3) U2.33(VSS4) U2.36(VSS5) U2.37(VSS6) U2.45(VSS7) U2.60(VSS8) U2.64(VSS9) U2.73(VSS10) U2.92(USBVSS) U2.100(VSS11) U2.102(VSS12) U2.105(AIN0) U2.106(AIN1) U2.113(VSS13) U2.114(VSS14) U2.115(VSS15) U2.122(VSS16) U2.138(VSS17) U2.144(VSS18) U15.1(GND) U20.2(GND) U21.2(GND) U22.6(VSSQ1) U22.12(VSSQ2) U22.28(VSS1) U22.41(VSS2) U22.46(VSSQ3) U22.52(VSSQ4) U22.54(VSS3) U23.6(VSSQ1) U23.12(VSSQ2) U23.28(VSS1) U23.41(VSS2) U23.46(VSSQ3) U23.52(VSSQ4) U23.54(VSS3) U24.1(GND) U26.4(GND) Y3.2
CPLD_CLKOUT: R139.1 U1.38(IO_30)
CPLD_CONN_IO0: J11.18 U1.13(IO_10)
CPLD_CONN_IO1: J11.20 U1.11(IO_8)
CPLD_CONN_IO2: J11.30 U1.2(IO_1)
CPLD_CONN_IO3: J11.7 U1.29(IO_21)
CPLD_CONN_IO4: J11.9 U1.26(IO_18)
CPLD_CONN_IO5: J11.11 U1.22(IO_15)
CPLD_CONN_IO6: J11.13 U1.19(IO_12)
CPLD_CONN_IO7: J11.15 U1.18(IO_11)
CPLD_CONN_IO8: J11.17 U1.12(IO_9)
CPLD_CONN_IO9: J11.19 U1.10(IO_7)
CPLD_CONN_IO10: J11.21 U1.9(IO_6)
CPLD_CONN_IO11: J11.23 U1.5(IO_4)
CPLD_CONN_IO12: J11.25 U1.4(IO_3)
CPLD_CONN_IO13: J11.27 U1.3(IO_2)
CPLD_CONN_IO14: J11.29 U1.1(IO_0)
CPLD_CONN_IO15: J11.6 U1.31(IO_23)
CPLD_CONN_IO16: J11.8 U1.30(IO_22)
CPLD_CONN_IO17: J11.10 U1.27(IO_19)
CPLD_CONN_IO18: J11.12 U1.24(IO_16)
CPLD_IO0: U1.47(IO_37) U2.137(CLKR0)
CPLD_IO1: U1.48(IO_38) U2.136(FSR0)
CPLD_IO2: U1.49(IO_39) U2.135(DR0)
CPLD_IO3: U1.50(IO_40) U2.134(CLKX0)
CPLD_IO4: U1.51(IO_41) U2.133(FSX0)
CPLD_IO5: U1.52(IO_42) U2.131(DX0)
CPLD_IO6: U1.62(IO_51) U2.93(/INT0)
CPLD_IO7: U1.61(IO_50) U2.94(/INT1)
CPLD_IO11: U1.53(IO_43) U2.123(CLKR2/MMC2.CMD)
CPLD_IO12: U1.54(IO_44) U2.121(FSR2/MMC2.DAT2)
CPLD_IO13: U1.55(IO_45) U2.120(DR2/MMC2.DAT1)
CPLD_IO14: U1.56(IO_46) U2.119(CLKX2/MMC2.DAT0)
CPLD_IO15: U1.58(IO_47) U2.117(FSX2/MMC2.DAT3)
CPLD_IO16: U1.59(IO_48) U2.116(DX2/MMC2.CLK)
CPLD_IO17: U1.60(IO_49) U2.91(/RST)
CPLD_IO20: J10.5 R137.2 U1.63(IO_52) U2.90(SCL)
CPLD_IO21: J10.3 R138.2 U1.64(IO_53) U2.89(SDA)
CPLD_IO22: R59.1 R60.2 U1.40(IO_31) U2.12(GPIO0)
CPLD_IO23: U1.42(IO_32) U2.10(GPIO1)
CPLD_IO24: U1.43(IO_33) U2.9(GPIO2)
CPLD_IO25: U1.44(IO_34) U2.143(GPIO3)
CPLD_IO26: U1.45(IO_35) U2.142(GPIO4)
CPLD_IO29: U1.46(IO_36) U2.140(TIN/TOUT0)
CPLD_MEM_CS: R197.1 U1.36(IO_28) U26.1(/CS)
CPLD_MISO: R198.1 U1.35(IO_27) U26.2(SO)
CPLD_MOSI: R200.2 U1.33(IO_25) U26.5(SI)
CPLD_RASP_IO0: J10.19 U1.28(IO_20)
CPLD_RASP_IO1: J10.21 U1.25(IO_17)
CPLD_RASP_IO2: J10.24 U1.21(IO_14)
CPLD_RASP_IO3: J10.23 U1.20(IO_13)
CPLD_SCK: R199.2 U1.34(IO_26) U26.6(SCK)
CPLD_TCK: J13.1 R194.1 U1.16(TCK)
CPLD_TDI: J13.9 R196.1 U1.15(TDI)
CPLD_TDO: J13.3 U1.17(TDO)
CPLD_TMS: J13.5 R195.1 U1.14(TMS)
DSP_A0: R142.1 U2.55(A0)
DSP_A1: R143.1 U2.54(A1)
DSP_A2: R144.1 U2.52(A2)
DSP_A3: R145.1 U2.51(A3)
DSP_A4: R146.1 U2.50(A4)
DSP_A5: R147.1 U2.48(A5)
DSP_A6: R148.1 U2.47(A6)
DSP_A7: R149.1 U2.46(A7)
DSP_A8: R150.1 U2.44(A8)
DSP_A9: R151.1 U2.43(A9)
DSP_A10: R152.1 U2.42(A10)
DSP_A12: R154.1 U2.39(A12)
DSP_A13: R155.1 U2.38(A13)
DSP_CAS: R160.1 U2.28(/SDCAS)
DSP_CKE: R161.1 U2.101(XF/CKE)
DSP_CLK: R159.1 U2.31(CLKMEM)
DSP_CS_SDR: R162.2 U2.21(/CE0)
DSP_D0: R165.2 U2.57(D0)
DSP_D1: R166.2 U2.58(D1)
DSP_D2: R167.2 U2.59(D2)
DSP_D3: R168.2 U2.61(D3)
DSP_D4: R169.2 U2.62(D4)
DSP_D5: R170.2 U2.63(D5)
DSP_D6: R171.2 U2.65(D6)
DSP_D7: R172.2 U2.66(D7)
DSP_D8: R173.2 U2.67(D8)
DSP_D9: R174.2 U2.69(D9)
DSP_D10: R175.2 U2.70(D10)
DSP_D11: R176.2 U2.71(D11)
DSP_D12: R177.2 U2.74(D12)
DSP_D13: R178.2 U2.75(D13)
DSP_D14: R179.2 U2.76(D14)
DSP_D15: R180.2 U2.77(D15)
DSP_DM0: R163.2 U2.26(/BE0)
DSP_DM1: R164.2 U2.27(/BE1)
DSP_PWR_EN: R57.2 U1.32(IO_24) U15.5(EN)
DSP_RAS: R157.1 U2.34(/SDRAS)
DSP_SDA10: R156.1 U2.35(SDA10)
DSP_WE: R158.1 U2.32(/SDWE)
DSPCLK: R139.2 U2.13(X2/CLKIN)
JTAG_EMU0: C111.1 J1.13 R2.1 U2.79(EMU0)
JTAG_EMU1: C111.2 J1.14 R3.1 U2.80(EMU1/OFF#)
JTAG_TCK: J1.9 J1.11 R1.1 U2.85(TCK)
JTAG_TDI: J1.3 U2.82(TDI)
JTAG_TDO: J1.7 U2.81(TDO)
JTAG_TMS: J1.1 U2.86(TMS)
JTAG_TRST: J1.2 R4.1 U2.84(/TRST)
SD_CLK: P2.5(CLK) R133.1 U2.124(DX1/MMC1.CLK)
SD_CMD: P2.2(CMD) R134.1 U2.130(CLKR1/MMC1.CMD)
SD_D0: P2.7(DAT0) R191.1 U2.127(CLKX1/MMC1.DAT0)
SD_D1: P2.8(DAT1) R190.1 U2.128(DR1/MMC1.DAT1)
SD_D2: P2.9(DAT2) R192.1 U2.129(FSR1/MMC1.DAT2)
SD_D3: P2.1(DAT3) R193.1 U2.125(FSX1/MMC1.DAT3)
SDA10: R156.2 U22.22(A10) U23.22(A10)
SEMC_A0: R142.2 U22.21(BA1) U23.21(BA1)
SEMC_A1: R143.2 U22.23(A0) U23.23(A0)
SEMC_A2: R144.2 U22.24(A1) U23.24(A1)
SEMC_A3: R145.2 U22.25(A2) U23.25(A2)
SEMC_A4: R146.2 U22.26(A3) U23.26(A3)
SEMC_A5: R147.2 U22.29(A4) U23.29(A4)
SEMC_A6: R148.2 U22.30(A5) U23.30(A5)
SEMC_A7: R149.2 U22.31(A6) U23.31(A6)
SEMC_A8: R150.2 U22.32(A7) U23.32(A7)
SEMC_A9: R151.2 U22.33(A8) U23.33(A8)
SEMC_A10: R152.2 U22.34(A9) U23.34(A9)
SEMC_A12: R154.2 U22.35(A11) U23.35(A11)
SEMC_A13: R155.2 U22.20(BA0) U23.20(BA0)
SEMC_CAS: R160.2 U22.17(C\A\S\) U23.17(C\A\S\)
SEMC_CKE: R161.2 U22.37(CKE) U23.37(CKE)
SEMC_CLK: R159.2 U22.38(CLK) U23.38(CLK)
SEMC_CS_SDR: R162.1 U22.19(C\S\) U23.19(C\S\)
SEMC_D0: R165.1 U22.2(DQ0)
SEMC_D1: R166.1 U22.5(DQ1)
SEMC_D2: R167.1 U22.8(DQ2)
SEMC_D3: R168.1 U22.11(DQ3)
SEMC_D4: R169.1 U22.44(DQ4)
SEMC_D5: R170.1 U22.47(DQ5)
SEMC_D6: R171.1 U22.50(DQ6)
SEMC_D7: R172.1 U22.53(DQ7)
SEMC_D8: R173.1 U23.2(DQ0)
SEMC_D9: R174.1 U23.5(DQ1)
SEMC_D10: R175.1 U23.8(DQ2)
SEMC_D11: R176.1 U23.11(DQ3)
SEMC_D12: R177.1 U23.44(DQ4)
SEMC_D13: R178.1 U23.47(DQ5)
SEMC_D14: R179.1 U23.50(DQ6)
SEMC_D15: R180.1 U23.53(DQ7)
SEMC_DM0: R163.1 U22.39(DQM)
SEMC_DM1: R164.1 U23.39(DQM)
SEMC_RAS: R157.2 U22.18(R\A\S\) U23.18(R\A\S\)
SEMC_WE: R158.2 U22.16(W\E\) U23.16(W\E\)
USB_D+: R136.2 R189.1 U2.3(USB_DP) U21.1
USB_D-: R135.2 U2.4(USB_DN) U21.6
WD_IN: U2.6(GPIO7) U20.4(WDI)
N07496: C33.1 C34.1 C35.1 L2.2 U2.104(ADVDD) U2.107(AVDD)
N0070636: R189.2 U2.2(PU)
N268570: C67.1 J9.S1(SHLD1) J9.S2(SHLD2) J9.S3(SHLD3) J9.S4(SHLD4) R61.1
N268704: J9.2(P2) R135.1
N268710: J9.3(P3) R136.1
N275198: U1.7(IO_5) Y3.3
N278160: U1.37(IO_29)
N287267: C44.1 U2.112(RTCINX1) Y2.1
N287307: C45.1 U2.111(RTCINX2) Y2.2
N294497: C83.1 L3.2 U2.95(USBPLLVDD)
N317150: R51.2 R52.2 U15.4(VFB)
N317170: D3.1(CATHODE) R6.2
N317314: C48.1 U15.6(VBST)
N317326: C48.2 L4.1 U15.2(SW)
N318893: C98.1 R181.2 R182.1 U18.1(GND/ADJ)
N321963: R184.2 R185.2 U24.4(VFB)
N322075: C99.1 U24.6(VBST)
N322087: C99.2 L5.1 U24.2(SW)
N322111: R183.1 U24.5(EN)
N323461: C109.1 R186.2 R187.1 U25.1(GND/ADJ)
N324026: D4.1(CATHODE) R188.2
N357436: R58.1 U20.3(#EN)
N357516: R59.2 U20.1(#WDO)
N360427: D7.2(ANODE) U2.141(GPIO6)
N361726: R202.2 SW3.3 SW3.4 U2.99(/INT4)
N364436: R203.1 Y3.1
N364531: L6.1 R203.2 Y3.4
N376455: R204.1 U2.20(ARDY)
N429962: D7.1(CATHODE) R201.2

Pads without a net: J1 6; J9 4; J10 1 7 8 10 11 12 13 15 16 17 18 22 26 27 28 29 31 32 33 35 36 37 38 40; J11 14 16 22 24 26 28; J13 6 7 8; P2 10; U2 14 15 16 17 19 22 23 25 40 96 97; U21 3 4; U22 4 7 10 13 15 36 40 42 45 48 51; U23 4 7 10 13 15 36 40 42 45 48 51

## Via types
v1: diameter 0.6, hole 0.3, TOP to BOTTOM, 655 vias

## Routing (per net, layer and track width the routed paths; a pad name or vN(x,y) marks a point on that pad's centre or on a via; arc(x,y) is an arc through that point)
1V6D: length 74.8
  TOP w0.127: 10.99,67.93 U18.2 ; U18.2 10.95,68.58 ; U18.2 11.67,68.58 ; U18.2 10.99,69.23 ; 10.95,68.58 U18.4 ; 10.95,68.58 9.37,67 R182.2 ; U18.4 3.31,68.58 ; U18.4 4,66.78 ; 3.93,72.42 4,72.36 4,70.78 ; 2.93,73.38 C61.1 5.04,73.38 ; R182.2 9.85,64.16 ; R182.2 8.89,64.16 ; 19.38,46.66 19.56,46.66 19.75,46.85 19.75,47.03 ; v1(21.62,40.37) 22.18,40.37 22.45,40.64 U2.41 ; 38.63,46.25 38.73,46.15
  TOP w0.254: U2.30 19.38,46.66 19.75,47.03 19.63,47.14 U2.29 ; U2.109 37.95,62.37 37.74,62.16 ; U2.87 38.66,50.65 ; U2.83 38.68,48.64 ; U2.110 37.47,62.39 37.02,61.95 36.37,61.95 ; C30.1 26.47,64.99 U2.132 26.47,61.82 ; 38.73,46.15 U2.78 ; U2.118 33.45,61.87 ; U2.68 35.97,43.84 ; U2.18 20.22,52.65 ; v1(28.45,40.13) U2.53 ; 21.91,61.76 21.73,61.76
  TOP w0.305: C31.1 16.9,52.65 U2.18
  TOP w0.889: U18.4 4,70.78 3.98,70.79 C61.1 ; 3.93,72.42 3.93,73.36
  TOP w1.27: 20.14,61.49 18.75,62.89 18.75,67.01
  BOTTOM w0.127: 22.45,40.74 22.45,40.64 22.18,40.37 v1(21.62,40.37) ; 9.33,67.9 C60.1 ; C60.1 9.86,68.55 ; C60.1 9.33,69.21
  BOTTOM w0.254: v1(28.45,40.13) 28.45,43.05 27.94,43.56 v1(27.94,45.11)
  BOTTOM w0.762: v1(32.68,61.05) C24.1 34.46,61.05 34.49,61.07 C26.1 C25.1 v1(36.87,61.07) ; C18.1 v1(19.81,52.53) ; v1(36.58,45.29) 38.15,45.29 v1(38.18,45.31) 38.51,44.98 v1(38.51,44.48) ; C17.1 v1(19.91,46.76) ; C23.1 v1(26.52,61.72)
  vias: v1(6.74,65.92) v1(6.76,70.48) v1(6.77,69.6) v1(6.77,68.68) v1(6.77,67.74) v1(6.77,66.83) v1(8.2,70.46) v1(8.22,69.57) v1(8.22,68.66) v1(8.22,67.72) v1(8.22,66.8) v1(8.19,65.89) v1(9.63,70.46) v1(9.64,69.57) v1(9.64,66.8) v1(9.61,65.89)
1V8D: length 60.2
  TOP w0.127: 89.54,65.76 R187.2 ; R187.2 90.02,63.22 87.17,60.38 87.17,57.23 ; R187.2 90.02,66.41 ; R187.2 90.49,65.76 ; U25.2 94.17,70.61 ; U25.2 92.8,70.61 ; U25.2 93.49,69.96 ; U25.2 93.49,71.26 ; C107.1 95.92,70.87 ; C107.1 94.86,70.87 ; C107.1 95.39,70.21 ; C107.1 95.39,71.52 ; 94.86,72.44 C106.1 ; C106.1 95.39,71.79 ; C106.1 95.92,72.44 ; C106.1 95.39,73.09 ; 85.81,70.61 U25.4 ; U25.4 86.5,68.81 ; U25.4 87.18,70.61
  TOP w0.254: 70.76,38.47 70.67,38.47 70.41,38.22 U1.8 70.41,36.32 70.74,35.99 70.74,35.86 v1(70.61,35.86) ; v1(84.4,60.07) 85.09,59.39 ; v1(77.77,45.87) 82.05,45.87 85.09,48.92 ; 70.41,44.83 U1.41 70.41,47.14 v1(70.2,47.35)
  TOP w0.381: 70.76,38.47 73.43,38.47 73.74,38.79 73.74,44.42 73.44,44.73 70.52,44.73 70.41,44.83
  BOTTOM w0.254: C143.1 70.07,46.59 70.2,46.72 v1(70.2,47.35) ; v1(88.7,66.01) 88.7,62 86.77,60.07
  BOTTOM w0.381: v1(70.61,35.86) 70.61,36.56 70.63,36.58
  BOTTOM w0.508: C138.1 71.25,37.71 70.63,37.09 70.63,36.58
  vias: v1(76.68,45.87) v1(76.68,45.19) v1(77.77,45.19) v1(86.16,49.45)
3V3CPLD: length 123
  TOP w0.127: U26.7 81.89,53.9 ; U26.7 81.89,52.93 ; U26.7 83.16,53.42 ; U20.5 79.45,63.42 79.65,63.22 82.12,63.22 82.7,63.8 82.7,64.8 ; U20.5 79.45,64.8 78.94,65.3 76.78,65.3 76.47,64.99 C110.1 76.47,63.29 R60.1 ; U20.5 79.83,63.89 ; U20.5 79.07,63.89 ; C105.1 93.97,77.21 ; C105.1 93.97,75.9 ; C105.1 93.44,76.56 ; C105.1 94.5,76.56 ; R185.1 86.39,77.84 ; R185.1 86.39,76.54 ; R185.1 86.87,77.19 ; R185.1 85.91,77.19 ; U26.8 83.16,54.69 ; U26.8 81.89,54.2 ; U26.8 v1(81.89,55.6) ; 93.15,80.05 C104.2 ; C104.2 94.46,80.05 ; C104.2 93.8,79.52 ; C104.2 93.8,80.58 ; L5.2 89.89,83.18 ; L5.2 88.81,80.9 ; L5.2 89.89,78.62 ; L5.2 90.97,80.9 ; 82.17,62.45 R58.2 ; R58.2 81.69,63.09 ; R58.2 82.65,63.09 ; R58.2 82.17,63.74 ; U26.3 77.16,52.63 ; U26.3 77.16,51.66 ; U26.3 75.9,52.15 ; 91.42,80.07 C100.2 ; C100.2 92.08,79.55 ; C100.2 92.08,80.6 ; C100.2 92.73,80.07 ; 77.86,58.65 R198.2 ; R198.2 78.81,58.65 ; R198.2 78.34,59.3 ; 93.49,72.26 U25.3 ; U25.3 94.17,72.91 ; U25.3 92.8,72.91 ; U25.3 93.49,73.56 ; 78.34,56.51 R197.2 77.86,57.16 ; C108.1 94.5,75.03 ; C108.1 93.97,75.68 ; C108.1 93.97,74.38 ; C108.1 93.44,75.03 ; 81.66,56.51 R199.1 82.14,57.16 ; v1(76.26,41.11) 76.24,41.11 76.13,41.01 U1.23 ; 81.18,58.65 R200.1 ; R200.1 81.66,59.3 ; R200.1 82.14,58.65
  TOP w0.178: v1(64.57,41.17) 65.21,41.17 65.45,41.41 U1.57 ; U1.6 69.61,36.13 69.55,36.07 69.5,36.07 v1(69.5,36.16)
  TOP w0.254: v1(71.47,47.27) 71.21,47.01 U1.39 ; C112.1 78.93,57.16 78.92,57.16 R197.2 R198.2 ; C112.1 81.1,57.16 81.11,57.16 R199.1 R200.1 ; C112.1 79.65,55.52 80.49,54.69 ; 89.92,56.13 J13.4 ; 89.92,56.13 90.07,55.98 91.74,55.98 92.2,55.52 92.2,54.03 91.49,53.31 90.47,53.31 89.64,52.48 89.64,51.59 89.17,51.12 87.71,51.12 86.5,52.33 R196.2 ; 89.92,56.13 89.79,56.01 86.61,56.01 86.36,55.75 86.36,55.25 R195.2
  TOP w0.381: 79.83,53.42 79.83,54.03 80.49,54.69 U26.8 ; 79.83,53.42 U26.7 ; 79.83,53.42 78.56,52.15 U26.3
  BOTTOM w0.127: J13.4 89.94,58.24 85.45,58.24 82.8,55.6 v1(81.89,55.6) ; 69.5,36.07 69.55,36.07 69.62,36.14 69.62,36.4 69.46,36.55 69.46,37.71 ; 69.5,36.07 v1(69.5,36.16) ; 69.5,36.07 69.5,35.67 69.41,35.59 69.41,35.43 69.89,34.95 70.48,34.95 70.79,34.65 L6.2 ; 70.83,40.79 C113.1 ; C113.1 71.36,41.45 ; C113.1 71.89,40.79 ; C113.1 71.36,40.14
  BOTTOM w0.254: 69.37,37.71 70.33,38.67 70.33,39.93 ; 66.71,41.55 67.96,42.8 69.09,42.8 ; v1(76.26,41.11) 74.55,41.11 73.44,40 72.21,40 72.01,40.21 ; 72.31,44.85 71.65,45.5
  BOTTOM w0.508: v1(64.57,41.17) 65.32,41.17 65.58,41.43 C115.1 66.71,41.55 ; 69.46,37.71 C114.1 ; 71.65,45.5 C116.1 71.52,46.24 71.47,46.29 v1(71.47,47.27)
  vias: v1(74.42,47.55) v1(74.4,46.86) v1(75.31,47.55) v1(75.31,46.86) v1(78.74,50.27) v1(78.74,48.79)
3V3DSP: length 808
  TOP w0.127: 53.85,38.49 R204.2 ; R204.2 54.33,39.14 ; R204.2 53.85,39.79 ; R204.2 53.37,39.14 ; C62.1 10.46,74.51 11.04,75.08 11.04,75.21 ; 53.3,49.28 R1.2 ; R1.2 54.6,49.28 ; R1.2 53.95,48.8 ; R1.2 53.95,49.76 ; 53.27,52.44 C36.1 ; C36.1 54.58,52.44 ; C36.1 53.92,52.97 ; C36.1 53.92,51.91 ; 54.03,4.67 58.88,9.52 58.88,26.97 58.6,27.25 57.84,27.25 57.23,27.86 56.31,27.86 55.55,28.63 55.55,34.21 56.34,35 56.34,36.7 57.15,37.52 57.15,38.13 v1(56.52,38.76) ; v1(32.33,43.18) 31.93,42.78 30.14,42.78 29.97,42.61 U2.56 ; R3.2 54.6,44.93 ; R3.2 53.3,44.93 ; R3.2 53.95,45.41 ; R3.2 53.95,44.46 ; 10.99,71.88 10.99,72.07 10.46,72.6 ; P2.11 56.51,27.05 ; P2.11 56.51,25.2 ; P2.11 55.83,26.12 ; P2.11 57.19,26.12 ; 16.69,80.4 C97.2 16.69,79.34 ; v1(26.09,40.06) 26.49,40.46 26.49,40.73 26.47,40.75 U2.49 ; U2.88 v1(41.45,51.16) ; 11.58,77.87 L4.2 11.58,80.02 ; R2.2 54.35,40.64 ; R2.2 53.4,40.64 ; R2.2 53.87,39.99 ; R2.2 53.87,41.29 ; U2.24 v1(19.66,49.66) ; 14.41,79.87 C49.2 15.06,79.34 ; 54.33,44.08 53.07,44.08
  TOP w0.254: v1(59.51,31.78) R133.2 ; v1(64.8,33.49) 64.58,33.49 ; 64.58,33.49 64.56,33.49 64.36,33.68 R137.1 ; 64.58,33.49 64.57,33.5 ; R193.2 62.41,31.72 v1(62.36,31.78) ; 55.37,27.03 55.55,27.03 55.83,27.31 56.54,27.31 ; 19.76,58.8 19.41,59.16 U2.5 ; U2.98 41.38,56.16 42.08,56.86 42.08,57.68 v1(41.63,58.12) ; 57.12,27.76 57.18,27.76 57.18,27.66 57.71,27.13 58.5,27.13 ; P2.11 56.54,26.16 56.54,27.31 ; R190.2 v1(56.63,31.81) ; 57.22,27.37 57.15,27.31 56.54,27.31 ; R192.2 63.85,31.66 v1(63.73,31.78) 63.73,32.74 62.94,33.53 62.94,35.81 61.18,37.57 61.18,38.12 R138.1 ; v1(60.96,31.78) 60.97,31.77 R134.2 ; v1(37.53,43.03) 37.95,42.61 U2.72 ; v1(29.46,61.89) U2.126 29.46,64.11 29.62,64.26 C16.1 ; v1(58.08,31.79) 58.01,31.72 58.07,31.67 R191.2 ; 53.75,54.62 50.53,54.62 J1.5 ; U2.8 19.48,57.66 19.76,57.94 ; U2.139 v1(22.96,61.93) ; 55.37,28.57 55.37,34.29 56.16,35.08 56.16,36.73 56.97,37.54 56.97,38.05 56.52,38.51 ; v1(55.73,38.81) 55.73,38.33
  TOP w0.381: U23.27 16.28,14.84 v1(16.28,13.34) ; U22.14 v1(26.67,28.6) 26.67,21.95 ; v1(15.57,30.35) 15.88,30.35 U22.27 ; 34.62,16.87 35.56,16.87 36.66,15.77 36.73,15.77 37.1,15.4 U23.1 ; 34.62,16.87 35.5,15.99 U23.3 ; 34.62,16.87 32.66,16.87 ; 31.32,16.87 30.7,16.24 U23.9 ; 31.32,16.87 32.66,16.87 ; 31.32,16.87 28.73,16.87 28.27,17.32 U22.43 ; v1(32.25,32.45) 30.67,30.87 U22.9 ; U22.49 33.07,17.3 32.99,17.23 32.99,17.2 32.66,16.87 ; U22.1 37.07,31.03 36.53,31.57 35.79,31.57 35.48,31.27 35.48,31.05 35.47,31.03 U22.3 ; 26.7,16.68 U23.14 26.7,9.74 26.56,9.61 26.56,8.42 28.3,6.69 U23.43 28.3,2.62 v1(29.16,1.76) ; 31.83,1.32 33.12,2.62 33.12,3.66 U23.49
  TOP w0.508: 55.45,37.13 56.29,37.97 56.29,38.53 ; 58.22,12.19 57.94,11.91 ; 58.22,12.19 58.22,27.13 ; 58.22,12.19 58.6,12.57 58.6,27.25 ; 57.94,11.91 57.17,11.14 ; 57.94,11.91 57.94,27.13 ; 57.17,11.14 56.74,10.72 56.74,24.94 56.69,24.99 ; 57.17,11.14 57.17,24.99 ; v1(56.52,38.76) 56.29,38.53 ; 56.29,38.53 54.69,36.93 ; 55.85,24.99 55.55,24.99 55.37,25.17 ; 55.85,24.99 56.26,24.99 ; 55.85,24.99 55.85,9.85 ; 56.26,10.26 55.85,9.85 ; 56.26,10.26 56.26,24.99 ; 56.26,10.26 56.29,10.26 ; 55.85,9.85 55.37,9.37 ; 56.18,27.76 57.12,27.76 57.44,27.44 57.44,27.15 ; v1(42.21,63.09) 42.52,63.09 42.9,63.48 L2.1 ; 57.44,27.15 57.44,25.07 ; 57.44,27.15 56.98,27.61 ; 57.44,25.07 57.44,7.84 ; 57.44,25.07 57.38,25.07 57.3,24.99 57.17,24.99 ; 68.99,24.7 69.56,24.12 ; 57.18,27.66 57.12,27.61 56.98,27.61 ; 56.69,24.99 56.26,24.99 ; 56.69,24.99 57.17,24.99 ; C59.1 11.01,74.08 C62.1 10.46,72.41 10.99,71.88 U18.3 ; R202.1 42.86,58.12 v1(41.63,58.12) ; 56.98,27.61 55.37,27.61
  TOP w0.762: 55.37,28.57 55.37,9.37 47.32,1.32 ; 55.37,28.57 54.99,28.96 ; 55.37,28.57 56.18,27.76 ; L4.2 14.14,78.94 C49.2 C97.2 ; 59.03,11.18 50.93,3.07 50.93,3.05 49.33,1.45 49.33,1.32 ; 59.03,11.18 59.03,10.21 ; 59.03,11.18 59.03,12.19 ; 59.03,12.19 59.03,14.07 ; 59.03,12.19 55.19,8.36 55.19,8.31 48.62,1.73 48.62,1.32 ; 59.03,10.21 59.03,9.42 57.44,7.84 57.24,7.84 50.72,1.32 50.22,1.32 50.22,1.5 51.31,2.59 51.41,2.59 59.03,10.21 ; 54.99,28.96 54.65,29.3 54.65,33.67 54.69,33.71 ; 54.99,28.96 54.99,34.01 ; 54.99,34.01 54.69,33.71 ; 54.99,34.01 55.45,34.47 55.45,34.9 ; 54.69,33.71 54.69,37.29 55.73,38.33 ; v1(56.52,38.76) 56.52,37.47 56.03,36.98 56.03,35.48 55.45,34.9 ; 23.27,58.19 v1(24.08,58.19) ; 55.45,34.9 55.45,37.13 ; 47.35,1.32 56.74,10.72 ; 19.76,57.94 v1(19.76,57.96) 19.76,58.8
  TOP w1.016: 38.11,59.71 38.56,60.16 38.56,61.7 40.55,63.69 ; v1(38.15,58.12) 37.03,58.12
  TOP w1.27: 17.06,79.87 18.66,79.87 21.59,82.8 43.81,82.8 ; 17.06,79.87 C97.2 ; 17.06,79.87 21.18,84 43.84,84 ; P2.4 68.99,24.61 67.11,22.73 61.77,22.73 59.03,19.99 59.03,14.07 56.79,11.84 ; 50.22,1.32 29.6,1.32 v1(29.16,1.76) ; v1(41.43,63.91) v1(42.21,63.91) 54.56,63.91 v1(54.61,63.96) 53.85,64.72 v1(41.43,64.72) ; v1(26.67,28.6) 27.3,27.97 v1(27.3,21.34) ; v1(32.25,32.45) 35.65,32.45 36.53,31.57 ; v1(38.15,58.12) 38.14,58.12 37.02,58.12 ; 15.85,79.87 15.85,80.39 15.86,80.4 15.86,80.74 16.35,81.22 16.68,81.22 20.7,85.24 43.87,85.24 ; 43.87,85.83 19.56,85.83 15.06,81.33 C49.2 ; v1(26.54,12.17) 26.54,8.41 27.81,7.14 v1(27.81,5.56) ; 35.46,16.76 v1(26.54,16.76) ; 37.02,58.12 37.03,58.12 37.03,58.64 38.11,59.71 ; 37.02,58.12 v1(34.85,58.12)
  BOTTOM w0.254: 56.54,31.93 56.68,31.79 v1(58.08,31.79) 58.71,31.79 58.72,31.78 v1(59.51,31.78) v1(60.96,31.78) v1(62.36,31.78) v1(63.73,31.78) 63.73,32.46 64.31,33.04 64.35,33.04 v1(64.8,33.49)
  BOTTOM w0.508: C7.1 19.32,57.96 v1(19.76,57.96) 19.76,57.72 C9.1 ; C13.1 23.91,48.3 v1(23.95,48.26) ; 23.2,58.19 22.57,58.19 C14.1 ; C4.1 42.42,58.12 v1(41.63,58.12) v1(38.15,58.12) ; C1.1 29.55,58.18 v1(29.46,58.27) ; v1(34.85,58.12) 34.76,58.2 C3.1 ; C12.1 26.35,43.27 26.39,43.23
  BOTTOM w0.762: v1(34.9,48.18) 34.9,44.42 36.3,43.03 v1(37.53,43.03) ; v1(26.54,12.17) 17.45,12.17 v1(16.28,13.34) ; 36.93,51.16 v1(34.95,51.16) ; 36.93,51.16 v1(41.45,51.16) ; 36.93,51.16 36.94,51.17 38.35,51.17 ; v1(19.76,57.96) 22.97,57.96 23.2,58.19 v1(24.08,58.19) ; v1(24.08,58.19) 23.9,58.37 23.9,59.64 22.96,60.58 v1(22.96,61.93) ; v1(24.08,58.19) 24.96,58.19 C8.1 ; v1(19.66,49.66) 21.06,48.26 v1(23.95,48.26) ; v1(27.05,48.21) 26.39,47.55 26.39,40.41 26.09,40.11 v1(26.09,40.06) ; v1(32.33,43.18) 32.33,47.27 v1(33.17,48.11) ; v1(29.46,58.27) v1(29.46,61.89) 29.53,61.83 C6.1 ; v1(15.57,30.35) 24.92,30.35 v1(26.67,28.6)
  BOTTOM w1.27: v1(32.25,32.45) 29.92,30.12 28.19,30.12 v1(26.67,28.6) ; v1(29.16,1.76) 27.81,3.11 v1(27.81,5.56) ; 53.44,62.79 v1(54.61,63.96) v1(54.61,60.02) ; 53.44,62.79 53.14,63.09 ; 53.44,62.79 v1(53.44,59.94) ; v1(27.3,21.34) 26.54,20.57 v1(26.54,16.76) v1(26.54,12.17)
  vias: v1(41.43,63.07) v1(41.44,62.26) v1(41.45,85.98) v1(41.47,85.2) v1(41.45,84.02) v1(41.45,82.83) v1(42.23,62.28) v1(42.27,86) v1(42.28,85.23) v1(42.27,84.02) v1(42.27,82.83) v1(42.27,64.74) v1(43.03,84.02) v1(43.03,82.83) v1(43.13,86) v1(43.14,85.23) v1(43.81,84.02) v1(43.79,82.83) v1(43.97,86) v1(44.01,85.2) v1(54.89,38.84) v1(55.22,32.92) v1(55.22,31.98) v1(55.22,31.01) v1(55.22,30.05) v1(55.22,28.83) v1(55.4,37.77) v1(55.4,36.63) v1(55.4,35.51) v1(55.45,34.21)
5VIN: length 130.1
  TOP w0.254: R183.2 81.21,75.49 80.82,75.87 80.82,78.34 U24.3 ; U21.5 13.08,58.07 12.62,58.53 12.62,58.98 12.17,59.43 7.56,59.43
  TOP w0.457: 46.02,87.43 45.36,88.09 13.44,88.09 9.88,84.53 6.07,84.53 1.91,80.37 1.91,67.56 5.05,64.41 5.05,63.04 5.97,62.13 C72.1 C71.1 C73.1 6.88,58.7 5.71,57.52 J9.1
  TOP w0.508: C50.2 4.68,78.12 U15.3 4.83,77.58 4.84,77.57 C95.2 C96.2 ; C101.2 73.88,78.68 68.58,83.97 49.48,83.97 46.02,87.43
  TOP w0.762: C101.2 C102.2 77.96,78.68 77.99,78.65 C103.2 79.95,78.65 79.96,78.64 U24.3
AGND: length 6.7
  TOP w0.127: 41.27,58.95 v1(41.22,58.95) ; U2.108 41,61.14 v1(41.22,61.37)
  TOP w0.305: C33.2 41.71,59.02 41.65,58.95 41.27,58.95 40.97,58.65 U2.103
  TOP w0.508: C33.2 C34.2 C35.2
DGND: length 426.2
  TOP w0.127: 13.08,56.34 U21.2 13.08,54.69 ; 29.62,66.21 C16.2 ; C16.2 28.96,66.74 ; C16.2 30.27,66.74 ; C16.2 29.62,67.27 ; 39.84,39.53 C11.2 ; C11.2 39.31,40.18 ; C11.2 39.84,40.84 ; C11.2 40.37,40.18 ; 25.79,66.61 C30.2 ; C30.2 26.44,66.08 ; C30.2 26.44,67.14 ; 37.1,2.76 U23.54 ; U23.54 36.72,3.69 ; U23.54 37.47,3.69 ; C31.2 15.81,52.02 ; C31.2 15.28,52.67 ; C31.2 14.75,52.02 ; C28.2 46.49,66.29 ; C28.2 45.96,65.64 ; C28.2 45.43,66.29 ; 2.91,62.13 C67.2 ; C67.2 3.44,62.78 ; C67.2 3.97,62.13 ; C67.2 3.44,61.48 ; 96.99,71.79 C106.2 ; C106.2 96.46,72.44 ; C106.2 97.52,72.44 ; C106.2 96.99,73.09 ; 37.17,16.19 C86.2 ; C86.2 36.64,16.84 ; C86.2 37.17,17.49 ; C86.2 37.7,16.84 ; 96.65,53.2 J10.6 ; J10.6 97.58,54.13 ; J10.6 95.72,54.13 ; 4.83,80.64 U15.1 4.1,80.16 ; 8.88,75.39 C59.2 ; C59.2 9.41,76.04 ; C59.2 9.41,74.73 ; C59.2 9.94,75.39 ; C10.2 42.49,53.45 ; C10.2 41.84,52.92 ; C10.2 43.15,52.92 ; 51.49,62.78 SW3.1 ; SW3.1 52.45,62.78 ; SW3.1 51.97,62.3 ; J1.12 J1.10 ; J1.12 50.89,45.75 ; J1.12 51.82,44.82 ; J1.10 51.82,49.21 ; J1.10 50.89,48.29 ; J13.2 91.91,59.74 ; J13.2 90.05,59.74 ; J13.2 90.98,60.67 ; 93.18,10.95 J10.39 ; J10.39 94.11,11.88 ; J10.39 94.11,10.02 ; J10.39 95.04,10.95 ; 91.42,78.47 C100.1 ; C100.1 92.08,77.94 ; C100.1 92.73,78.47 ; 5.53,54.92 J9.5 3.82,54.92 ; U23.6 33.47,14.85 ; U23.6 32.72,14.85 ; U23.6 33.1,15.78 ; 90.05,49.58 J13.10 ; J13.10 90.98,50.51 ; J13.10 90.98,48.65 ; J13.10 91.91,49.58 ; 35.5,2.76 U23.52 ; U23.52 35.87,3.69 ; U23.52 35.12,3.69 ; J10.30 97.58,23.65 ; J10.30 96.65,22.72 ; J10.30 95.72,23.65 ; J10.30 96.65,24.58 ; C29.2 34.18,66.76 ; C29.2 33.53,66.24 ; C29.2 33.53,67.29 ; 92.37,74.38 C108.2 ; C108.2 91.84,75.03 ; C108.2 92.37,75.68 ; J1.8 51.82,51.75 ; J1.8 51.82,49.9 ; J1.8 50.89,50.83 ; 14.75,53.57 C19.2 ; C19.2 15.28,52.92 ; C19.2 15.81,53.57 ; C19.2 15.28,54.22 ; 15.89,18.8 U22.28 16.27,17.88 ; 16.03,78.27 C97.1 ; C97.1 16.69,77.74 ; C97.1 17.34,78.27 ; 96.65,43.04 J10.14 95.72,43.97 ; 2.71,76.71 C95.1 ; C95.1 3.24,77.36 ; C95.1 3.77,76.71 ; C95.1 3.24,76.05 ; 95.04,28.73 J10.25 93.18,28.73 ; 8.63,62.13 C72.2 ; C72.2 9.16,62.78 ; C72.2 9.69,62.13 ; 11.55,76.94 R57.1 10.6,76.94 ; U22.41 27.05,18.8 ; U22.41 26.67,17.88 ; U22.41 26.29,18.8 ; U22.41 26.67,19.73 ; 30.67,17.88 U22.46 ; U22.46 30.29,18.8 ; U22.46 31.05,18.8 ; C50.1 3.83,79.72 ; C50.1 3.17,80.25 ; C50.1 3.17,79.19 ; C50.1 2.52,79.72 ; 37.07,17.88 U22.54 ; U22.54 36.69,18.8 ; U22.54 37.45,18.8 ; 45.18,67.54 C27.2 ; C27.2 46.24,67.54 ; C27.2 45.71,68.19 ; U23.28 16.67,3.69 ; U23.28 15.92,3.69 ; U23.28 16.3,2.76 ; 9.16,58.05 C73.2 ; C73.2 9.69,58.7 ; C73.2 8.63,58.7 ; 51.97,68.3 SW3.2 ; SW3.2 52.45,68.78 ; SW3.2 51.49,68.78 ; Y3.2 68.76,32.82 ; Y3.2 68.76,31.09 ; Y3.2 69.5,31.96 ; Y3.2 68.02,31.96 ; 3.03,64.29 R61.2 ; R61.2 3.99,64.29 ; R61.2 3.51,63.64 ; R61.2 3.51,64.94 ; 95.72,18.57 J10.34 ; J10.34 97.58,18.57 ; J10.34 96.65,17.64 ; 32.69,29.96 U22.6 ; U22.6 33.07,30.89 ; U22.6 33.45,29.96 ; R52.1 8.43,75.21 ; R52.1 7.47,75.21 ; R52.1 7.95,75.86 ; R52.1 7.95,74.56 ; 50.89,55.91 J1.4 ; J1.4 51.82,54.98 ; J1.4 51.82,56.83 ; 76.84,77.08 C102.1 ; C102.1 77.5,77.6 ; C102.1 78.15,77.08 ; C102.1 77.5,76.55 ; 35.09,18.8 U22.52 ; U22.52 35.47,17.88 ; U22.52 35.85,18.8 ; 3.24,74.53 C96.1 ; C96.1 3.77,75.18 ; C96.1 2.71,75.18 ; C96.1 3.24,75.84 ; P2.6 64.67,26.12 ; P2.6 63.99,27.05 ; P2.6 63.31,26.12 ; P2.6 63.99,25.2 ; 13.11,72.61 C62.2 ; C62.2 12.06,73.53 ; C62.2 13.11,74.45 ; C62.2 14.16,73.53 ; 77.16,50.39 U26.4 75.9,50.88 ; J11.1 89.4,46.46 ; J11.1 88.47,47.38 ; J11.1 88.47,45.53 ; J11.1 87.54,46.46 ; 8.63,60.66 C71.2 ; C71.2 9.69,60.66 ; C71.2 9.16,60 ; 95.63,69 C109.2 96.28,69.53 ; 94.87,65.14 R186.1 ; R186.1 95.35,65.79 ; R186.1 94.39,65.79 ; R186.1 94.87,66.43 ; C101.1 75.95,77.6 ; C101.1 75.95,76.55 ; C101.1 76.6,77.08 ; C101.1 75.29,77.08 ; 30.32,3.69 U23.46 ; U23.46 30.7,2.76 ; U23.46 31.07,3.69 ; 21.34,70.56 R201.1 ; R201.1 20.69,71.04 ; R201.1 21.98,71.04 ; R201.1 21.34,71.52 ; C107.2 97.52,70.87 ; C107.2 96.46,70.87 ; C107.2 96.99,71.52 ; C107.2 96.99,70.21 ; C112.2 v1(80.63,58.76) ; 37.76,31.57 C74.2 ; C74.2 38.82,31.57 ; C74.2 38.29,30.92 ; 92.37,75.9 C105.2 ; C105.2 92.37,77.21 ; C105.2 91.84,76.56 ; 40.02,16.19 C87.2 ; C87.2 40.55,16.84 ; C87.2 39.49,16.84 ; C87.2 40.02,17.49 ; 26.58,1.1 C91.2 ; C91.2 26.58,2.41 ; C91.2 27.11,1.75 ; C91.2 26.05,1.75 ; 81.13,81.02 U24.1 80.4,80.54 ; 56.61,2.74 P2.12 ; P2.12 55.83,3.92 ; P2.12 57.39,3.92 ; P2.12 56.61,5.1 ; U23.12 28.3,15.78 ; U23.12 28.67,14.85 ; U23.12 27.92,14.85 ; J11.5 88.47,42.3 ; J11.5 87.54,41.38 ; J11.5 89.4,41.38 ; C103.1 79.62,77.05 ; C103.1 78.97,77.58 ; C103.1 78.32,77.05 ; C103.1 78.97,76.52 ; J11.3 88.47,44.84 ; J11.3 88.47,42.99 ; J11.3 89.4,43.92 ; J11.3 87.54,43.92 ; 20.15,41.68 U2.37 20.47,40.77 ; C83.2 43.59,54.84 ; C83.2 42.54,54.84 ; C83.2 43.07,55.49 ; R181.1 6.95,64.14 ; R181.1 6,64.14 ; R181.1 6.48,63.49 ; R181.1 6.48,64.78 ; P2.3 71.37,26.12 ; P2.3 70.01,26.12 ; P2.3 70.69,25.2 ; P2.3 70.69,27.05 ; 84.06,2.74 P2.13 ; P2.13 83.28,3.92 ; P2.13 84.06,5.1 ; P2.13 84.84,3.92 ; 13.9,16.93 C90.2 ; C90.2 15.21,16.93 ; C90.2 14.55,17.46 ; C90.2 14.55,16.4 ; R184.1 82.21,77.17 ; R184.1 81.26,77.17 ; R184.1 81.74,76.52 ; R184.1 81.74,77.81 ; 76.54,34.67 R194.2 ; R194.2 77.19,35.15 ; R194.2 77.84,34.67 ; 93.15,78.45 C104.1 ; C104.1 93.8,77.92 ; C104.1 94.46,78.45 ; 93.18,49.05 J10.9 ; J10.9 94.11,48.12 ; J10.9 94.11,49.98 ; 6.63,72.46 C61.2 ; C61.2 6.63,74.3 ; C61.2 5.58,73.38 ; C61.2 7.69,73.38 ; U22.12 28.65,29.96 ; U22.12 28.27,30.89 ; U22.12 27.89,29.96 ; U23.41 27.07,3.69 ; U23.41 26.7,2.76 ; U23.41 26.32,3.69 ; 96.65,35.42 J10.20 ; J10.20 96.65,37.28 ; J10.20 95.72,36.35 ; 15.06,77.74 C49.1 15.72,78.27 ; U20.2 80.4,61.98 v1(79.88,62.51) ; 10.47,60.77 C98.2 ; C98.2 11.13,60.24 ; C98.2 11.78,60.77 ; C98.2 11.13,61.3 ; C75.2 38.79,32.79 ; C75.2 37.74,32.79 ; C75.2 38.27,33.44 ; v1(45.92,28.4) 45.92,32.81
  TOP w0.254: v1(17.35,62.05) 17.35,61.68 17.89,61.14 U2.1 ; U2.11 17.34,56.16 17.25,56.08 v1(16.63,56.08) ; v1(32.18,40.06) 32.18,40.56 31.95,40.79 U2.60 ; v1(35.28,65) 36.02,64.26 36.02,64.16 35.97,64.11 ; v1(35.28,65) 35.28,64.37 35.34,64.31 35.34,64.22 35.46,64.11 U2.114 ; v1(35.28,65) 34.95,64.67 U2.115 ; U2.138 23.47,64.41 v1(23.14,64.74) ; R4.2 53.2,55.9 53.2,55.91 J1.4 ; 35.97,64.11 35.97,64.86 36.1,65 ; 35.97,64.11 U2.113 ; U2.64 33.96,42.57 34.24,42.85 34.24,42.92 v1(34.36,42.92) ; v1(16.64,57.71) 17.07,58.14 U2.7 ; U2.144 20.47,64.52 v1(20.09,64.9) ; v1(17.4,43.17) 17.89,43.66 U2.36 ; v1(41.35,43.23) 40.92,43.66 U2.73 ; U2.33 v1(20.02,45.16) ; 31.62,64.52 31.68,64.46 v1(31.7,64.46) 31.7,64.44 31.47,64.21 U2.122 ; U2.92 v1(41.33,53.16) ; U2.37 20.47,42.28 20.15,42.6 v1(19.91,42.6) ; U2.100 v1(41.2,57.15) ; C36.2 53.2,50.84 53.18,50.83 J1.8 ; U2.45 24.46,40.77 24.26,40.56 24.26,40.27 v1(24.27,40.27)
  TOP w0.305: U2.105 41.12,59.64 ; U2.102 40.97,58.14 ; U2.106 41.15,60.15
  TOP w0.381: v1(37.52,5.18) 37.1,4.76 U23.54 ; v1(28.47,28.42) 28.27,28.63 U22.12 ; U22.52 35.47,20.28 v1(35.05,20.7) ; v1(32.61,28.42) 33.07,28.88 U22.6 ; U23.6 33.1,13.61 v1(32.77,13.28) ; U22.46 30.67,20.05 v1(30.89,20.27) ; U22.54 37.07,20.33 v1(37.39,20.65) ; U23.12 v1(28.3,13.54) ; U22.28 16.27,19.87 v1(15.77,20.37) ; U23.46 30.7,4.99 v1(30.38,5.31) ; v1(25.88,5.69) 26.7,4.88 U23.41 ; v1(35.08,5.18) 35.5,4.76 U23.52 ; v1(15.47,5.59) 16.3,4.76 U23.28
  TOP w0.457: C72.2 C71.2
  TOP w0.762: 35.26,65.02 v1(35.28,65) 36.1,65 v1(36.16,65.05)
  BOTTOM w0.127: 50.89,50.83 J1.8 ; J1.8 51.82,51.75 ; J1.8 51.82,49.9 ; J1.8 52.74,50.83 ; 36.66,49.38 C22.2 ; C22.2 36.14,50.04 ; C22.2 37.19,50.04 ; 30.51,56.05 C1.2 ; C1.2 31.16,56.58 ; C1.2 29.85,56.58 ; C1.2 30.51,57.11 ; J1.4 51.82,56.83 ; J1.4 52.74,55.91 ; J1.4 50.89,55.91 ; J1.4 51.82,54.98 ; C44.2 37.39,68.56 ; C44.2 36.74,68.03 ; C44.2 38.04,68.03 ; C44.2 37.39,67.51 ; 50.89,45.75 J1.12 ; J1.12 51.82,46.67 ; J1.12 52.74,45.75 ; J1.12 51.82,44.82 ; 96.65,35.42 J10.20 ; J10.20 95.72,36.35 ; J10.20 97.58,36.35 ; J10.20 96.65,37.28 ; C26.2 34.8,60 ; C26.2 34.14,59.47 ; C26.2 34.8,58.95 ; C5.2 36.56,54.43 ; C5.2 36.56,53.12 ; C5.2 36.03,53.77 ; C5.2 37.09,53.77 ; C32.2 21.58,42.16 ; C32.2 22.11,41.5 ; C32.2 21.05,41.5 ; C23.2 26.52,59.98 ; C23.2 27.17,59.45 ; C23.2 25.86,59.45 ; C23.2 26.52,58.92 ; 70.72,39.31 C138.2 ; C138.2 72.03,39.31 ; C138.2 71.37,38.78 ; 32.25,15.65 C88.2 ; C88.2 32.78,16.3 ; C88.2 32.78,14.99 ; C88.2 33.31,15.65 ; 36.14,48.31 C21.2 ; C21.2 37.19,48.31 ; C21.2 36.66,48.96 ; J10.34 97.58,18.57 ; J10.34 96.65,17.64 ; J10.34 96.65,19.5 ; J10.34 95.72,18.57 ; C143.2 70.07,44.43 ; C143.2 70.73,43.9 ; C143.2 69.42,43.9 ; 88.47,42.99 J11.3 ; J11.3 89.4,43.92 ; J11.3 88.47,44.84 ; J11.3 87.54,43.92 ; C14.2 22.35,56.9 ; C14.2 22.35,55.85 ; C14.2 21.7,56.38 ; C14.2 23.01,56.38 ; C20.2 37.19,46.56 ; C20.2 36.14,46.56 ; C20.2 36.66,45.9 ; 39.88,67.53 C45.2 ; C45.2 40.53,68.06 ; C45.2 39.22,68.06 ; C45.2 39.88,68.59 ; J1.10 52.74,48.29 ; J1.10 50.89,48.29 ; J1.10 51.82,49.21 ; J1.10 51.82,47.36 ; C92.2 35.59,2.92 ; C92.2 35.06,2.27 ; C92.2 34.54,2.92 ; C92.2 35.06,3.57 ; C8.2 24.97,57.11 ; C8.2 24.31,56.58 ; C8.2 24.97,56.05 ; C77.2 30.29,19.35 ; C77.2 30.82,18.69 ; C77.2 29.76,18.69 ; C77.2 30.29,18.04 ; C17.2 22.74,46.76 ; C17.2 22.21,46.11 ; C17.2 22.21,47.41 ; C17.2 21.68,46.76 ; J13.2 90.98,60.67 ; J13.2 91.91,59.74 ; J13.2 90.05,59.74 ; J13.2 90.98,58.81 ; C6.2 31.66,60.86 ; C6.2 30.6,60.86 ; C6.2 31.13,61.51 ; C6.2 31.13,60.21 ; 30.28,28.08 C76.2 ; C76.2 30.28,29.14 ; C76.2 29.62,28.61 ; C76.2 30.93,28.61 ; J10.14 96.65,44.9 ; J10.14 96.65,43.04 ; J10.14 97.58,43.97 ; J10.14 95.72,43.97 ; 70.65,24.09 C52.2 ; C52.2 70.12,24.74 ; C52.2 71.18,24.74 ; C52.2 70.65,25.39 ; 94.11,48.12 J10.9 ; J10.9 94.11,49.98 ; J10.9 93.18,49.05 ; J10.9 95.04,49.05 ; 87.54,41.38 J11.5 ; J11.5 88.47,42.3 ; J11.5 88.47,40.45 ; J11.5 89.4,41.38 ; 33.48,58.92 C24.2 ; C24.2 32.82,59.45 ; C24.2 34.13,59.45 ; C24.2 33.48,59.98 ; C89.2 28.74,13.08 ; C89.2 27.68,13.08 ; C89.2 28.21,12.43 ; C13.2 22.38,50.43 ; C13.2 23.03,49.9 ; C13.2 22.38,49.37 ; C13.2 21.72,49.9 ; 24.22,43.92 C12.2 ; C12.2 24.75,43.26 ; C12.2 24.75,44.57 ; C12.2 25.28,43.92 ; C4.2 43.55,56.53 ; C4.2 42.9,57.06 ; C4.2 42.25,56.53 ; C4.2 42.9,56 ; C78.2 28.69,27.63 ; C78.2 28.69,26.32 ; C78.2 29.22,26.97 ; C78.2 28.16,26.97 ; 17.36,56.27 C9.2 ; C9.2 17.89,56.92 ; C9.2 17.36,57.57 ; C9.2 16.83,56.92 ; 68.31,40.77 C115.2 ; C115.2 68.31,42.08 ; C115.2 67.78,41.43 ; C3.2 33.98,56.6 ; C3.2 32.67,56.6 ; C3.2 33.32,57.13 ; C3.2 33.32,56.08 ; 88.47,45.53 J11.1 ; J11.1 88.47,47.38 ; J11.1 87.54,46.46 ; J11.1 89.4,46.46 ; J10.39 95.04,10.95 ; J10.39 94.11,10.02 ; J10.39 93.18,10.95 ; J10.39 94.11,11.88 ; C79.2 34.99,19.32 ; C79.2 35.52,18.67 ; C79.2 34.99,18.02 ; C79.2 34.46,18.67 ; 33.47,44.12 C2.2 34,44.77 ; C25.2 36.02,60 ; C25.2 36.02,58.95 ; C25.2 36.67,59.47 ; 90.05,49.58 J13.10 ; J13.10 90.98,48.65 ; J13.10 90.98,50.51 ; J13.10 91.91,49.58 ; J10.25 95.04,28.73 ; J10.25 94.11,29.66 ; J10.25 93.18,28.73 ; J10.25 94.11,27.8 ; 14.09,29.18 C80.2 ; C80.2 15.15,29.18 ; C80.2 14.62,28.53 ; C80.2 14.62,29.84 ; C18.2 22.89,52.53 ; C18.2 22.36,51.87 ; C18.2 21.84,52.53 ; C18.2 22.36,53.18 ; 17.36,57.67 C7.2 ; C7.2 17.89,58.32 ; C7.2 16.83,58.32 ; 69.24,38.78 C114.2 ; C114.2 69.89,39.31 ; C114.2 68.59,39.31 ; 70.87,43.9 C116.2 71.52,44.43 ; 96.65,53.2 J10.6 ; J10.6 95.72,54.13 ; J10.6 96.65,55.06 ; J10.6 97.58,54.13 ; J10.30 96.65,24.58 ; J10.30 96.65,22.72 ; J10.30 97.58,23.65 ; J10.30 95.72,23.65 ; 73.49,40.79 C113.2 72.96,41.45 ; 80,42.21 C118.2 ; C118.2 80.53,42.87 ; C118.2 81.06,42.21 ; C118.2 80.53,41.56
  BOTTOM w0.762: C2.2 34,43.28 v1(34.36,42.92) ; C20.2 C21.2 36.7,48.35 v1(36.7,49.17) 36.7,50 C22.2 ; 25.83,56.06 25.31,56.58 C8.2
  vias: v1(1.64,34.67) v1(2.84,34.67) v1(4.03,34.7) v1(5.17,34.7) v1(6.96,12.19) v1(7.64,11.51) v1(8.32,10.83) v1(9.01,10.15) v1(9.69,9.46) v1(10.37,8.78) v1(11.05,8.1) v1(12.11,66.17) v1(12.4,32.31) v1(13.25,58.87) v1(13.41,66.57) v1(13.92,37.16) v1(14.08,70.94) v1(14.51,56.62) v1(14.76,37.16) v1(15.12,55.15) v1(16.13,54.35) v1(16.21,37.19) v1(17.58,37.16) v1(19.02,37.13) v1(19.76,58.8) v1(20.52,37.16) v1(21.74,78.56) v1(21.95,37.16) v1(21.89,8.43) v1(22.28,59.46) v1(22.33,57.12) v1(22.28,55.21) v1(22.3,53.44) v1(22.3,51.59) v1(22.28,49.12) v1(23.14,11.15) v1(23.16,13.28) v1(23.26,46.68) v1(23.44,37.13) v1(23.88,55.45) v1(23.88,54.18) v1(23.88,52.91) v1(23.88,51.64) v1(23.88,50.37) v1(24.77,68.91) v1(24.84,37.21) v1(25.29,46.68) v1(25.45,59.46) v1(25.92,55.45) v1(25.92,54.18) v1(25.92,52.91) v1(25.92,51.64) v1(25.92,50.37) v1(26.26,37.16) v1(26.84,70.92) v1(27.33,46.68) v1(27.66,37.21) v1(27.9,69.03) v1(27.95,55.45) v1(27.95,54.18) v1(27.95,52.91) v1(27.95,51.64) v1(27.95,50.37) v1(28.09,81.03) v1(28.09,79.86) v1(28.12,77.87) v1(28.09,76.06) v1(28.14,59.46) v1(28.78,72.87) v1(29.06,37.19) v1(29.36,46.68) v1(29.49,31.34) v1(30.05,68.81) v1(29.98,55.45) v1(29.98,54.18) v1(29.98,52.91) v1(29.98,51.64) v1(29.98,50.37) v1(30.08,81.03) v1(30.08,79.86) v1(30.08,77.91) v1(30.17,71.4) v1(30.53,37.16) v1(30.73,74.83) v1(30.76,59.49) v1(31.39,46.68) v1(31.46,67.32) v1(31.87,81.03) v1(31.87,79.86) v1(31.9,77.93) v1(31.92,76.03) v1(31.9,73.2) v1(32.01,55.45) v1(32.01,54.18) v1(32.01,52.91) v1(32.01,51.64) v1(32.01,50.37) v1(33.27,59.46) v1(33.63,46.69) v1(33.94,72.18) v1(34.46,81.03) v1(34.46,79.86) v1(34.49,77.93) v1(34.51,76.03) v1(34.59,73.87) v1(35.25,70.67) v1(36.2,59.41) v1(36.53,56.95) v1(36.5,53.77) v1(36.5,52.35) v1(36.58,81.05) v1(36.58,79.88) v1(36.6,77.95) v1(36.63,76.03) v1(36.7,73.88) v1(36.68,71.46) v1(36.86,68.87) v1(38.4,81.03) v1(38.4,79.86) v1(38.43,77.93) v1(38.45,76.03) v1(38.53,73.87) v1(38.51,71.46) v1(38.57,68.87) v1(40.17,81.03) v1(40.17,79.86) v1(40.2,77.93) v1(40.22,76.03) v1(40.3,73.87) v1(40.28,71.46) v1(40.28,68.87) v1(41.66,59.79) v1(43.1,59.82) v1(43.9,56.79) v1(44.09,24.1) v1(44.4,59.82) v1(45.72,59.82) v1(45.77,81.03) v1(45.77,79.86) v1(45.8,77.93) v1(45.82,76.03) v1(45.9,73.87) v1(45.87,71.46) v1(45.87,68.87) v1(45.9,25.45) v1(45.95,24.18) v1(45.97,26.8) v1(46,22.66) v1(46,21.18) v1(45.97,19.74) v1(46.13,10.77) v1(46.16,13.72) v1(46.21,12.12) v1(46.23,7.98) v1(46.23,6.51) v1(46.21,5.06) v1(47.73,13.56) v1(47.8,81.03) v1(47.8,79.86) v1(47.82,77.93) v1(47.85,76.03) v1(47.78,28.5) v1(47.8,10.77) v1(47.92,73.87) v1(47.9,71.46) v1(47.9,68.87) v1(49.82,81.03) v1(49.82,79.86) v1(49.85,77.93) v1(49.87,76.03) v1(49.95,73.87) v1(49.92,71.46) v1(49.92,68.87) v1(50.83,30.2) v1(51.2,16.93) v1(51.44,15.72) v1(51.61,14.43) v1(51.84,81.03) v1(51.84,79.86) v1(51.87,77.93) v1(51.9,76.03) v1(51.95,71.46) v1(51.95,68.87) v1(51.97,73.87) v1(53.06,12.86) v1(53.25,11.65) v1(53.45,10.46) v1(53.77,9.14) v1(53.87,81.03) v1(53.87,79.86) v1(53.89,77.93) v1(53.92,76.03) v1(54,73.87) v1(53.97,71.46) v1(53.97,68.87) v1(56.28,81.07) v1(56.28,79.9) v1(56.3,77.97) v1(56.33,76.04) v1(56.41,73.88) v1(56.38,71.47) v1(56.38,68.9) v1(56.64,32.69) v1(56.95,29.97) v1(57.38,39.47) v1(57.79,32.55) v1(58.27,81.03) v1(58.27,79.86) v1(58.29,77.93) v1(58.32,76.03) v1(58.4,73.87) v1(58.37,71.46) v1(58.41,38.92) v1(58.42,30) v1(58.9,45.36) v1(59.39,32.56) v1(59.56,67.33) v1(59.94,29.95) v1(59.98,23.93) v1(59.98,11.23) v1(59.98,8.69) v1(59.98,6.15) v1(59.98,3.61) v1(59.98,1.07) v1(60.1,73.63) v1(60.25,81.07) v1(60.25,79.9) v1(60.24,76.03) v1(60.16,38.61) v1(60.27,77.97) v1(60.42,28.43) v1(61.01,32.54) v1(61.22,69.1) v1(61.34,66.22) v1(61.39,64.62) v1(61.37,29.95) v1(61.61,59.49) v1(61.61,45.34) v1(61.9,28.42) v1(62,35.89) v1(62.52,23.93) v1(62.52,21.39) v1(62.52,18.85) v1(62.52,16.31) v1(62.52,13.77) v1(62.52,11.23) v1(62.52,8.69) v1(62.52,6.15) v1(62.52,3.61) v1(62.52,1.07) v1(62.64,32.46) v1(62.84,29.92) v1(62.89,70.84) v1(63.69,41.17) v1(64.33,72.48) v1(64.34,29.92) v1(64.36,43.61) v1(65.06,23.93) v1(65.06,21.39) v1(65.06,18.85) v1(65.06,16.31) v1(65.06,13.77) v1(65.06,11.23) v1(65.06,8.69) v1(65.06,6.15) v1(65.06,3.61) v1(65.06,1.07) v1(65.28,28.98) v1(65.63,73.86) v1(65.91,30.54) v1(66.92,75.25) v1(66.85,63.09) v1(66.9,37.36) v1(67.6,21.39) v1(67.6,18.85) v1(67.6,16.31) v1(67.6,13.77) v1(67.6,11.23) v1(67.6,8.69) v1(67.6,6.15) v1(67.6,3.61) v1(67.6,1.07) v1(67.72,76.05) v1(68.25,43.99) v1(68.25,40.44) v1(68.25,39.24) v1(68.66,30.76) v1(69.11,63.2) v1(69.8,30.76) v1(70.14,21.39) v1(70.14,18.85) v1(70.14,16.31) v1(70.14,13.77) v1(70.14,11.23) v1(70.14,8.69) v1(70.14,6.15) v1(70.14,3.61) v1(70.14,1.07) v1(70.69,43.99) v1(71.25,63.17) v1(71.3,30.76) v1(72.31,31.2) v1(72.54,29.29) v1(72.68,23.93) v1(72.68,21.39) v1(72.68,18.85) v1(72.68,16.31) v1(72.68,13.77) v1(72.68,11.23) v1(72.68,8.69) v1(72.68,6.15) v1(72.68,3.61) v1(72.68,1.07) v1(73,43.26) v1(73,41.78) v1(72.97,39.24) v1(73.69,63.17) v1(75.22,23.93) v1(75.22,21.39) v1(75.22,18.85) v1(75.22,16.31) v1(75.22,13.77) v1(75.22,11.23) v1(75.22,8.69) v1(75.22,6.15) v1(75.22,3.61) v1(75.22,1.07) v1(76.11,29.3) v1(77.76,23.93) v1(77.76,21.39) v1(77.76,18.85) v1(77.76,16.31) v1(77.76,13.77) v1(77.76,11.23) v1(77.76,8.69) v1(77.76,6.15) v1(77.76,3.61) v1(77.76,1.07) v1(80.3,23.93) v1(80.3,21.39) v1(80.3,18.85) v1(80.3,16.31) v1(80.3,13.77) v1(80.3,11.23) v1(80.3,8.69) v1(80.3,6.15) v1(80.3,3.61) v1(80.3,1.07) v1(82.84,23.93) v1(82.84,21.39) v1(82.84,18.85) v1(82.84,16.31) v1(82.84,13.77) v1(82.84,11.23) v1(82.84,8.69) v1(82.84,6.15) v1(82.84,3.61) v1(82.84,1.07) v1(85.38,11.23) v1(85.38,8.69) v1(85.38,6.15) v1(85.38,3.61) v1(85.38,1.07) v1(87.56,8.86) v1(87.56,6.32) v1(87.56,3.78) v1(87.56,1.24) v1(90.1,8.86) v1(90.1,6.32) v1(90.1,3.78) v1(90.1,1.24) v1(92.64,8.86) v1(92.64,6.32) v1(92.64,3.78) v1(92.64,1.24) v1(95.18,8.86) v1(95.18,6.32) v1(95.18,3.78) v1(95.18,1.24)
